# Altium PCB DE-140824.PcbDoc (part 1 of 2)
Units mil, origin at the board's own origin, x right, y up, seen from the top; angles counter-clockwise.
Board outline 2677.17 x 5787.4 mil, 4 copper layers (Top Layer, GND, PWR, Bottom Layer), stack 30.634 mil thick; 176 components, 215 nets, 592 pads, 37 vias.
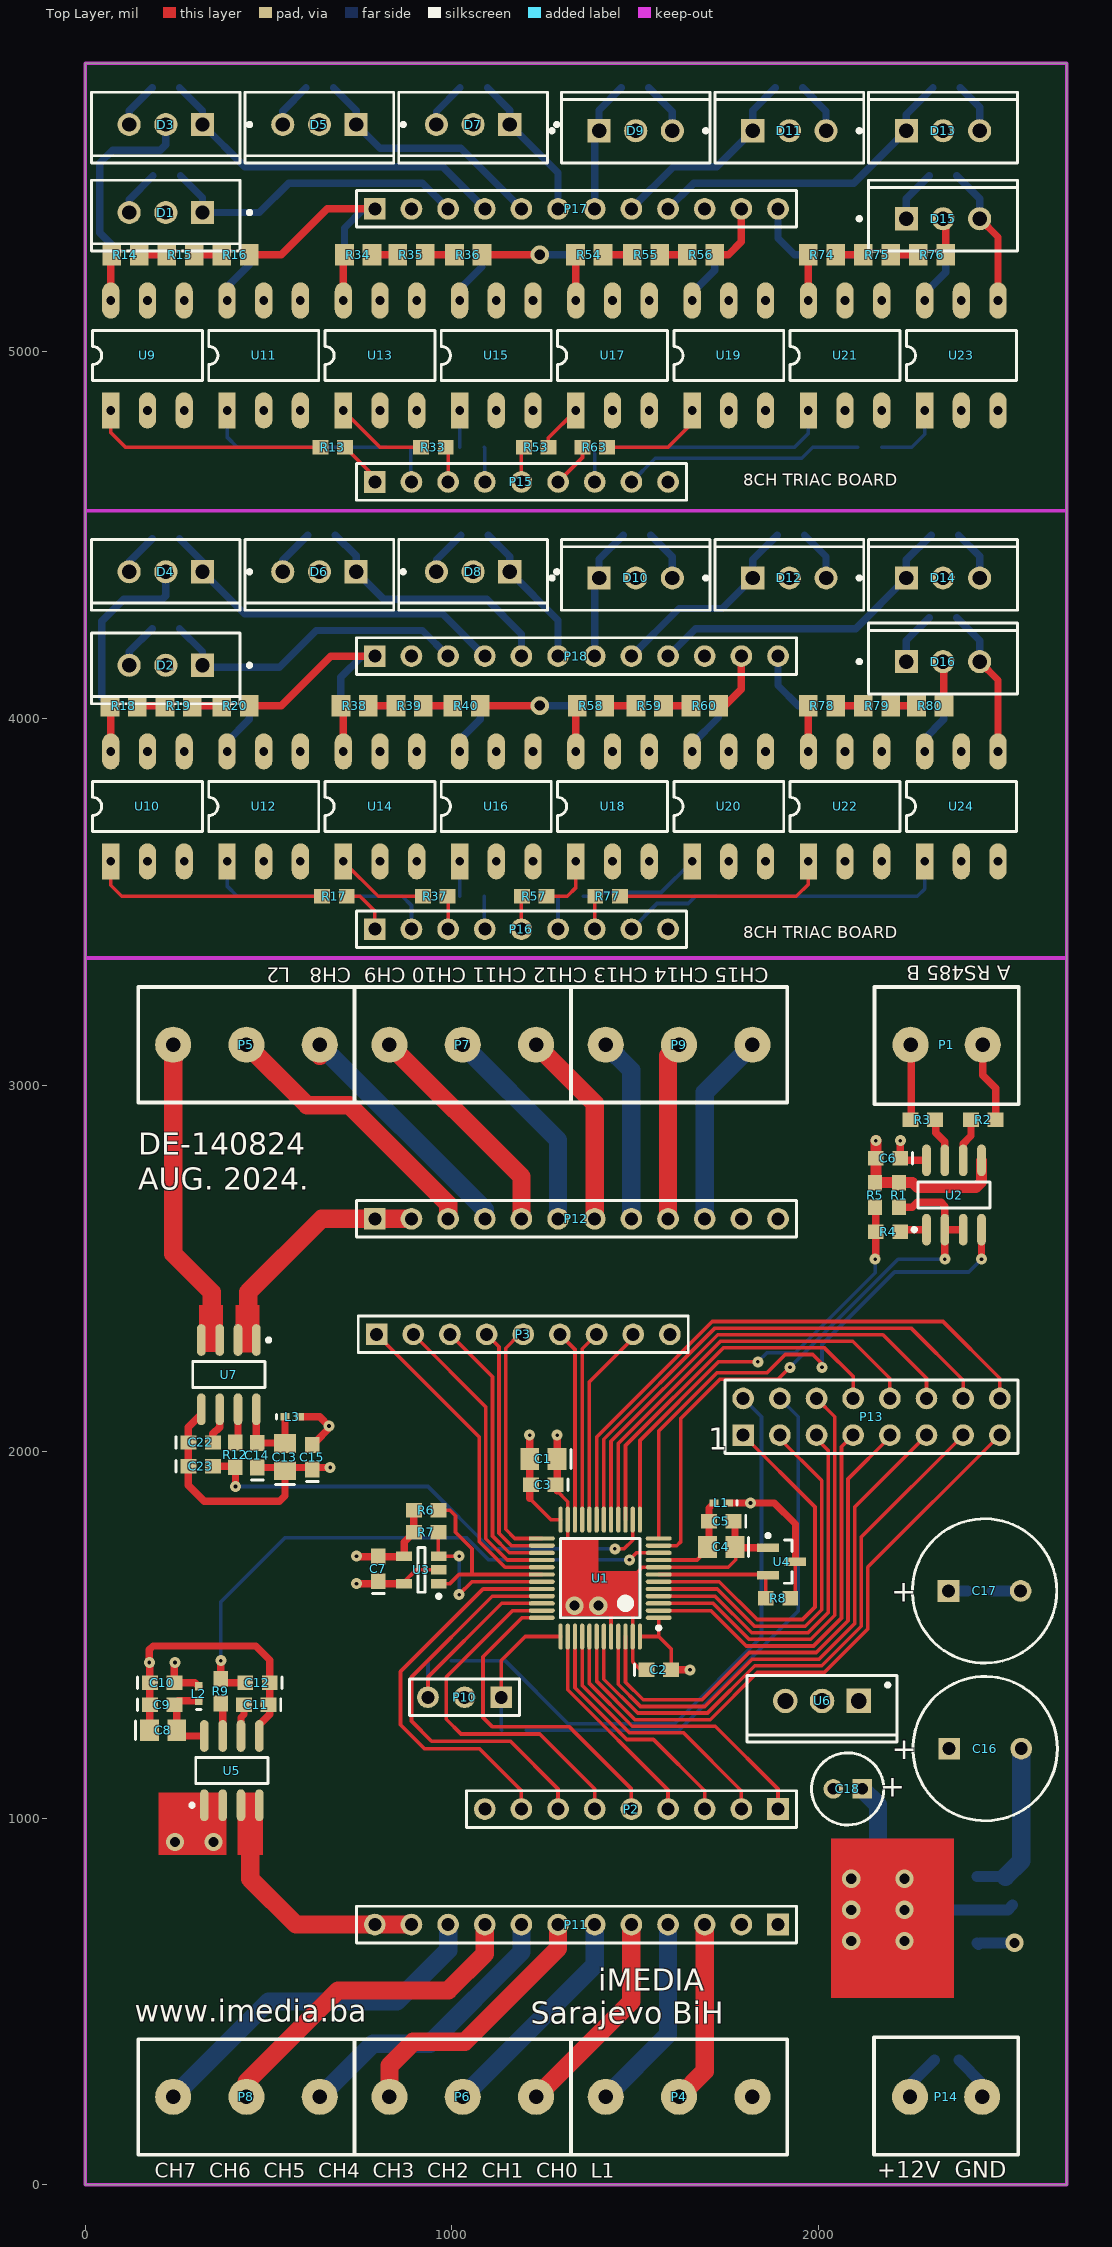
[diagram p0: Top Layer view]
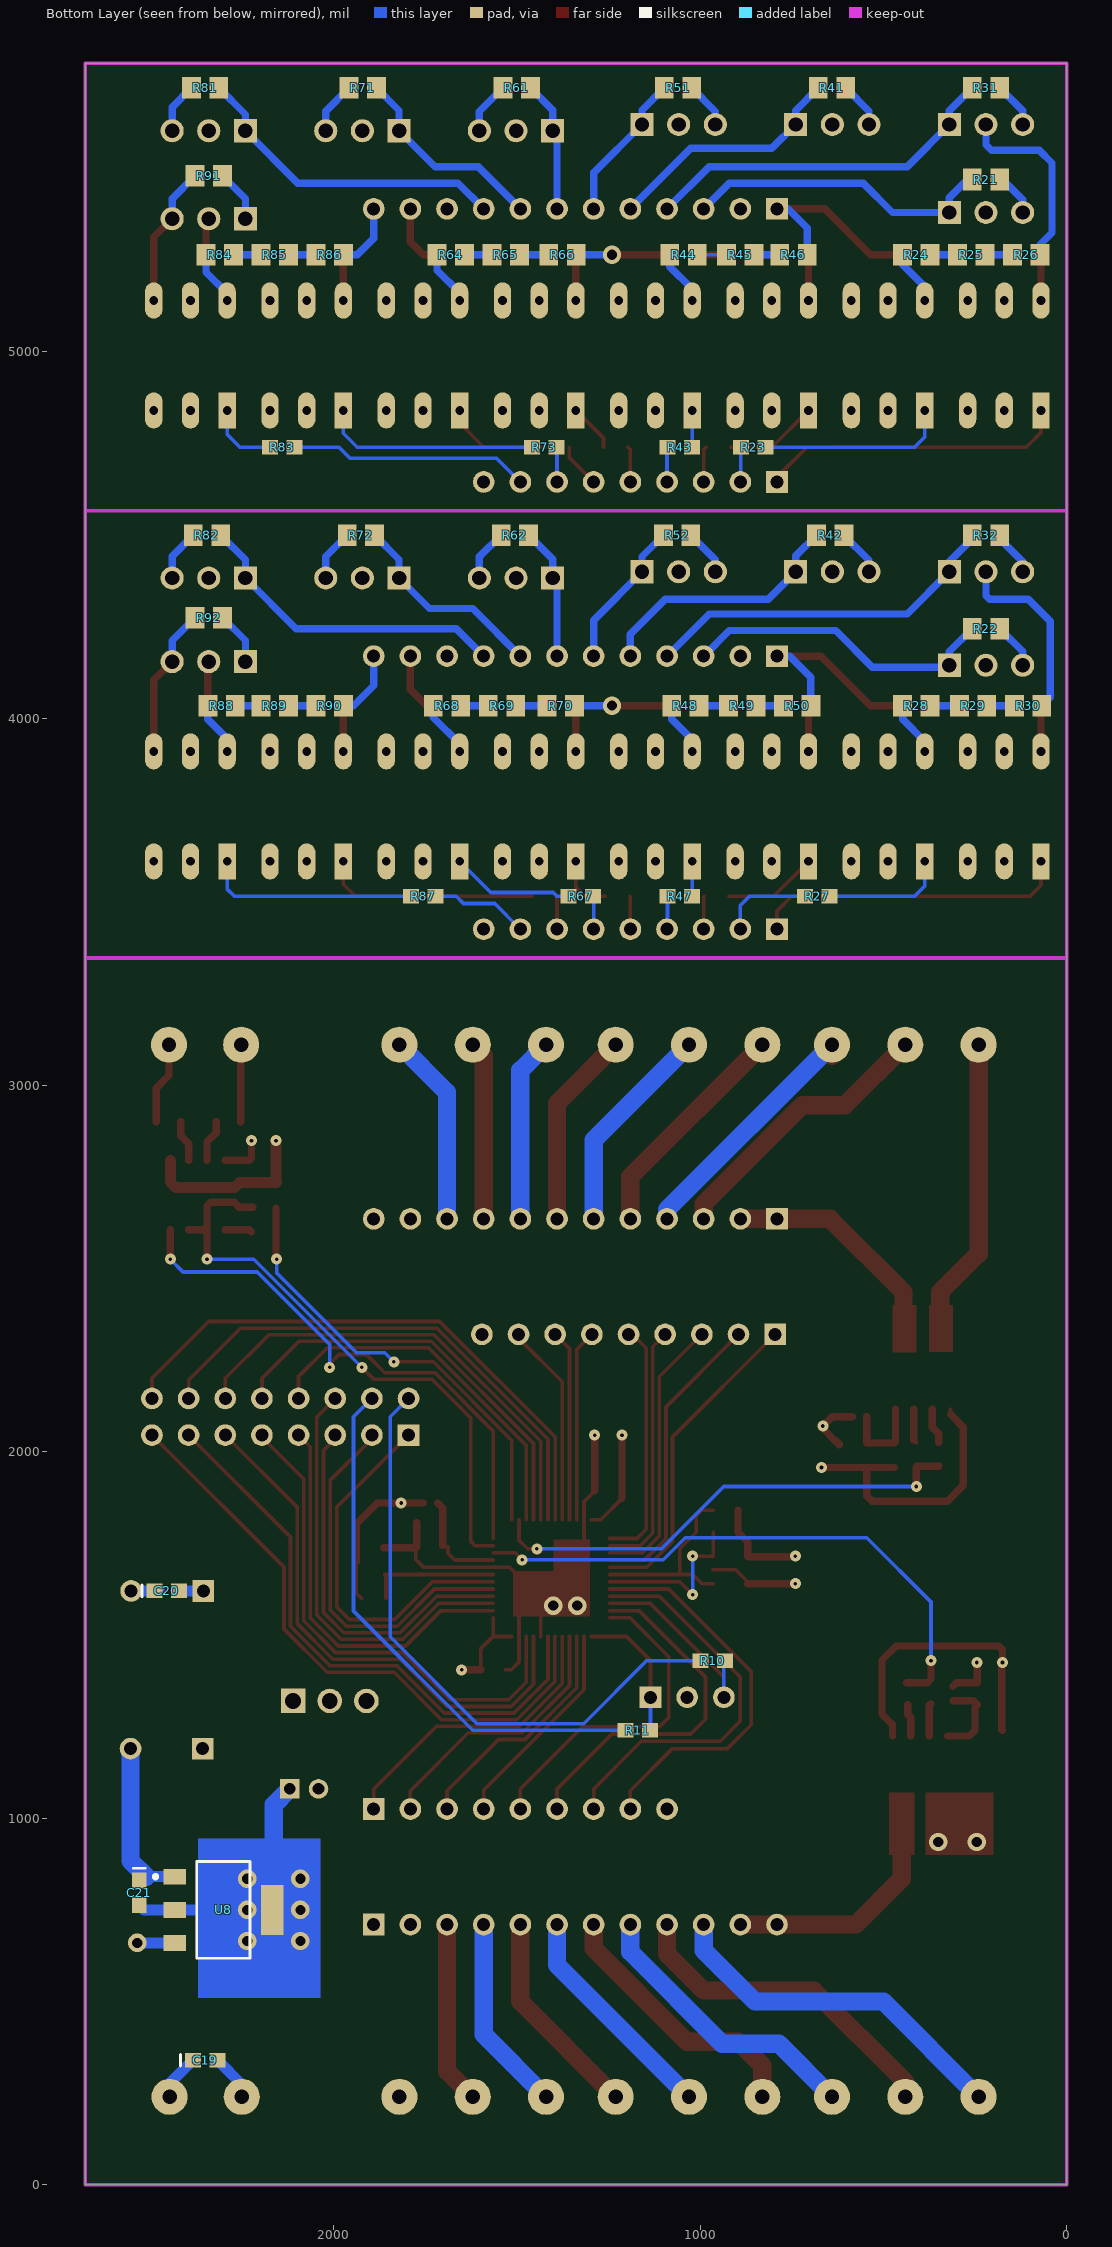
[diagram p1: Bottom Layer view, seen from below]
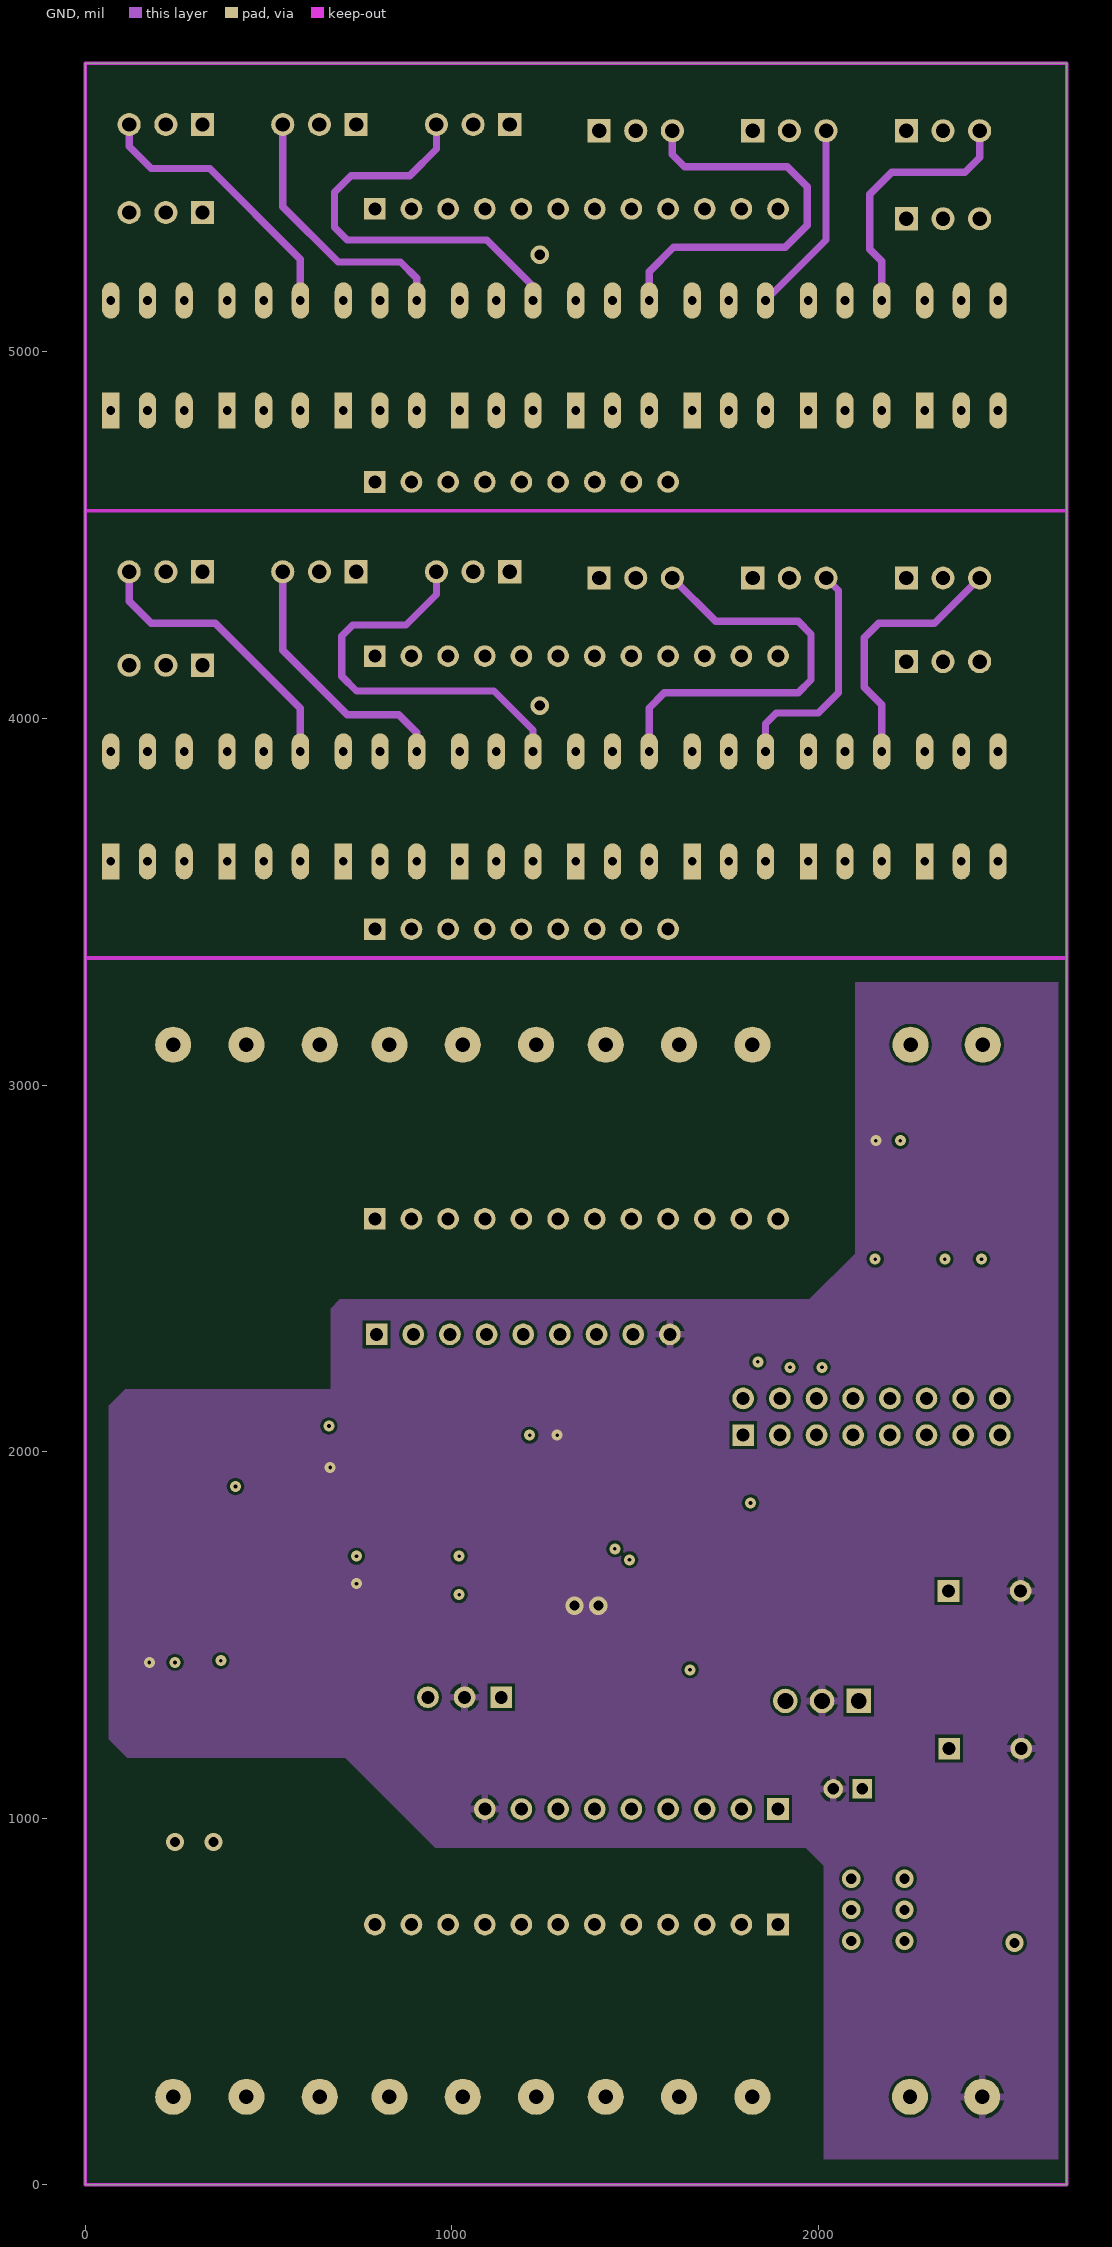
[diagram p2: GND]
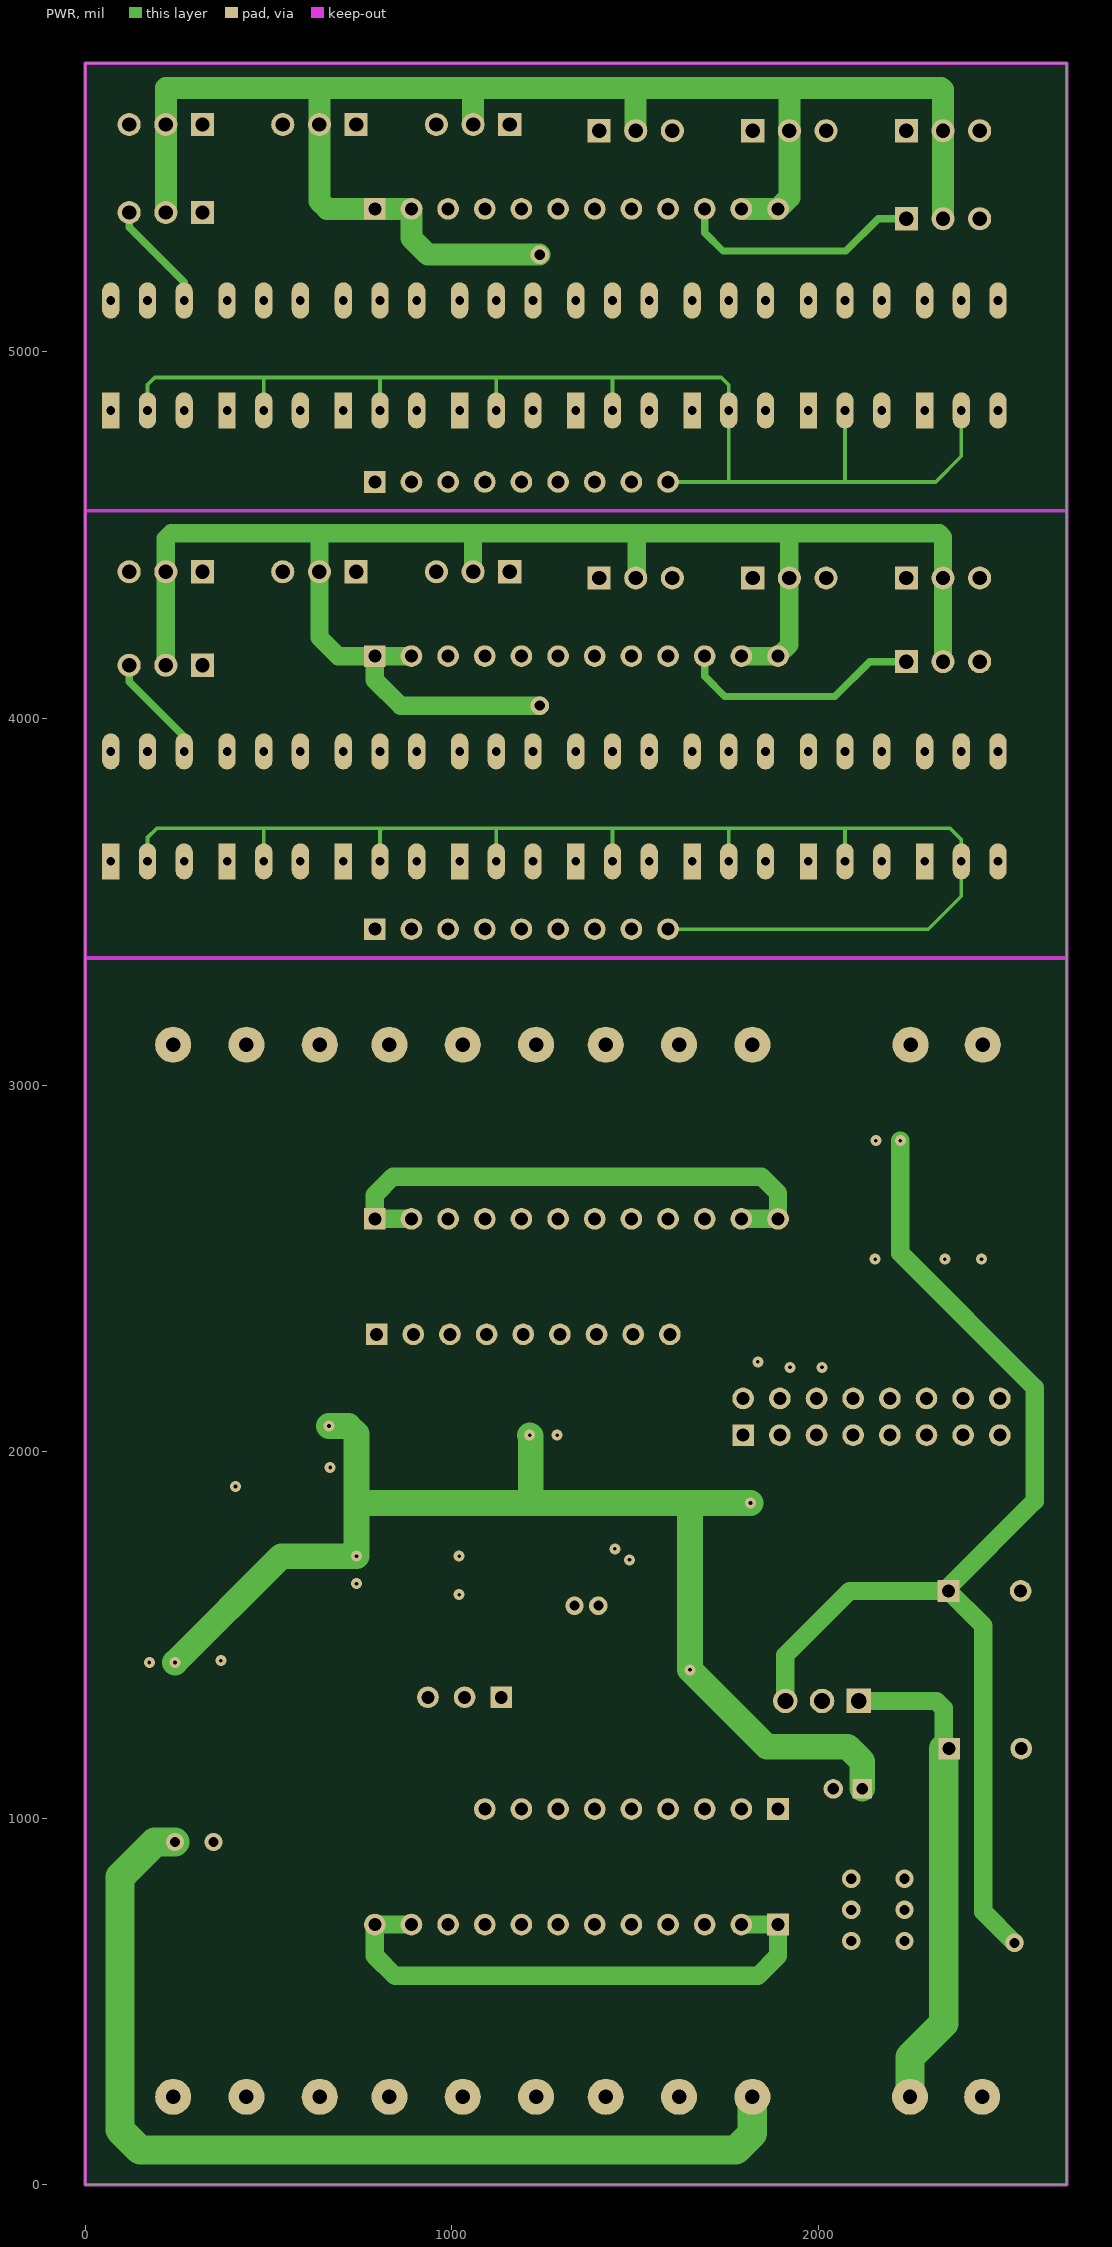
[diagram p3: PWR]

## Layer stack, top to bottom
Top Solder: solder mask 0.4, Solder Resist, Dk 3.5
Top Layer: signal copper 1.4
Dielectric 1: core 10, FR-4, Dk 4.2
GND: signal copper 1.417
Dielectric 3: prepreg 5, Dk 4.2
PWR: signal copper 1.417
Dielectric 2: core 10, Dk 4.2
Bottom Layer: signal copper 1.4
Bottom Solder: solder mask 0.4, Solder Resist, Dk 3.5

## Board outline
0,0 0,5787.4 2677.17,5787.4 2677.17,0

## Design rules (kind name [scope] priority, off if disabled: settings)
BoardOutlineClearance [All] p1: gap=11.81 ignorepadtopadclearanceinfootprint=FALSE except(15.75: Arc-SplitBarrior Arc-SplitContinuation Track-SplitBarrior Track-SplitContinuation SMDPad-SplitBarrior SMDPad-SplitContinuation THPad-SplitBarrior THPad-SplitContinuation Via-SplitBarrior Via-SplitContinuation Fill-SplitBarrior Fill-SplitContinuation Poly-SplitBarrior Poly-SplitContinuation Region-SplitBarrior Region-SplitContinuation Text-SplitBarrior Text-SplitContinuation)
Clearance "Clearance Different Nets" [All] p1: gap=7.87 ignorepadtopadclearanceinfootprint=FALSE except(3.5: Arc-Arc Arc-Track Arc-SMDPad Track-Track Track-SMDPad; 5: SMDPad-SMDPad SMDPad-Via THPad-Via Via-Via; 10: Arc-Via Arc-Text Track-Via Track-Text SMDPad-Text THPad-Text Via-Text Fill-Text Poly-Text Region-Text Text-Text; 19.68: THPad-THPad Via-Hole)
Clearance "Clearance Same Nets" [All] p2: gap=7.87 ignorepadtopadclearanceinfootprint=FALSE except(3.5: Arc-Arc Arc-Track Arc-SMDPad Track-Track Track-SMDPad SMDPad-SMDPad; 5: SMDPad-Via THPad-Via; 10: Arc-Via Arc-Text Track-Via Track-Text SMDPad-Text THPad-Text Via-Via Via-Text Fill-Text Poly-Text Region-Text Text-Text)
Clearance "Clearance Bottom Layer" [OnLayer('Bottom Layer')] p3: gap=8 ignorepadtopadclearanceinfootprint=TRUE except(10: Arc-Text Track-Text SMDPad-Text THPad-Text Via-Text Fill-Text Poly-Text Region-Text Text-Text)
Clearance "Clearance Top Layer" [OnLayer('Top Layer')] p4: gap=8 ignorepadtopadclearanceinfootprint=TRUE except(10: Arc-Text Track-Text SMDPad-Text THPad-Text Via-Text Fill-Text Poly-Text Region-Text Text-Text)
HoleSize [All] p1: absolutevalues=TRUE maxlimit=248.03 minlimit=7.87 maxpercent=80.000 minpercent=20.000
MinimumAnnularRing [All] p1: minimumring=5.12
MinimumSolderMaskSliver [All] p1: minsoldermaskwidth=3.94
PolygonConnect PolygonConnect_1 [All] p1: thpad.connectstyle=Relief thpad.reliefconductorwidth=20 thpad.reliefentries=4 thpad.polygonreliefangle="90 Angle" thpad.airgapwidth=10 smdpad.connectstyle=Relief smdpad.reliefconductorwidth=20 smdpad.reliefentries=4 smdpad.polygonreliefangle="90 Angle" smdpad.airgapwidth=10 via.connectstyle=Direct via.reliefconductorwidth=20 via.reliefentries=4 via.polygonreliefangle="90 Angle" via.airgapwidth=10
RoutingCorners [All] p1: cornerstyle=Round minsetback=100 maxsetback=100
RoutingVias [All] p1: holewidth=19.68 width=39.37 viastyle="Through Hole" minholewidth=7.87 minwidth=13.78 maxholewidth=39.37 maxwidth=78.74
SilkToSilkClearance [All] p1: silktosilkclearance=3.94
SilkToSolderMaskClearance [IsPad] p1: minsilkscreentomaskgap=3.94 clearancetoexposedcopper=TRUE
SolderMaskExpansion [All] p1: expansion=4 istentingtop=FALSE
Width [All] p1: maxlimit=100 minlimit=3.5 preferedwidth=15
25 further rules are at their usual default settings.

## Classes and differential pairs
component class DE-140824: C1 C2 C3 C4 C5 C6 C7 C8 C9 C10 C11 C12 C13 C14 C15 C16 C17 C18 C19 C20 C21 C22 C23 L1 L2 L3 P1 P2 P3 P4 P5 P6 P7 P8 P9 P10 P11 P12 P13 P14 R1 R2 R3 R4 R5 R6 R7 R8 R9 R10 R11 R12 U1 U2 U3 U4 U5 U6 U7 U8
component class DE-140824_01: D1 D2 D3 D4 D5 D6 D7 D8 D9 D10 D11 D12 D13 D14 D15 D16 P15 P16 P17 P18 R13 R14 R15 R16 R17 R18 R19 R20 R21 R22 R23 R24 R25 R26 R27 R28 R29 R30 R31 R32 R33 R34 R35 R36 R37 R38 R39 R40 R41 R42 R43 R44 R45 R46 R47 R48 R49 R50 R51 R52 R53 R54 R55 R56 R57 R58 R59 R60 R61 R62 R63 R64 R65 R66 R67 R68 R69 R70 R71 R72 R73 R74 R75 R76 R77 R78 R79 R80 R81 R82 R83 R84 R85 R86 R87 R88 R89 R90 R91 R92 U9 U10 U11 U12 U13 U14 U15 U16 U17 U18 U19 U20 U21 U22 U23 U24

## Components (designator, comment, footprint, x,y, rotation, side; value= is the part's Value field where it differs from the comment)
C1 "C0805" 0805 1250,1980 r180 top value=4u7
C2 "C0603" 0603 1565,1405 r0 top value=100nF
C3 "C0603" 0603 1250,1910 r180 top value=100nF
C4 "C0805" 0805 1735,1740 r180 top value=4u7
C5 "C0603" 0603 1735,1810 r180 top value=100nF
C6 "100nF" 0603 2190,2800 r180 top
C7 "C0603" 0603 800,1680 r90 top value=100nF
C8 "C0805" 0805 212.6,1240 r0 top value=4u7
C9 "C0603" 0603 210,1310 r0 top value=100nF
C10 "C0603" 0603 210,1370 r0 top value=100nF
C11 "C0603" 0603 466.54,1310 r180 top value=10nF
C12 "C0603" 0603 470,1370 r180 top value=100nF
C13 "C0805" 0805 545,1985 r90 top value=4u7
C14 "C0603" 0603 470,1990 r90 top value=100nF
C15 "C0603" 0603 620,1985 r90 top value=100nF
C16 "470uF" CAPPR5-10X12.5 2455,1190 r0 top
C17 "470uF" CAPPR5-10X12.5 2453.43,1620 r0 top
C18 "22uF" CAPPR2-5X11 2080,1080 r180 top value=47uF
C19 "100nF" 0603 2350,340 r180 bottom
C20 "100nF" 0603 2455,1620 r180 bottom
C21 "100nF" 0603 2530,796.54 r270 bottom
C22 "C0603" 0603 315,2025 r0 top value=10nF
C23 "C0603" 0603 315,1960 r0 top value=100nF
D1 "BTA08-600" ONSC-TO-220-3-221A-07 220,5380 r270 top
D2 "BTA08-600" ONSC-TO-220-3-221A-07 220,4145 r270 top
D3 "BTA08-600" ONSC-TO-220-3-221A-07 220,5620 r270 top
D4 "BTA08-600" ONSC-TO-220-3-221A-07 220,4400 r270 top
D5 "BTA08-600" ONSC-TO-220-3-221A-07 639.08,5620 r270 top
D6 "BTA08-600" ONSC-TO-220-3-221A-07 639.08,4400 r270 top
D7 "BTA08-600" ONSC-TO-220-3-221A-07 1058.16,5620 r270 top
D8 "BTA08-600" ONSC-TO-220-3-221A-07 1058.16,4400 r270 top
D9 "BTA08-600" ONSC-TO-220-3-221A-07 1501.84,5603.07 r90 top
D10 "BTA08-600" ONSC-TO-220-3-221A-07 1501.84,4383.07 r90 top
D11 "BTA08-600" ONSC-TO-220-3-221A-07 1920.92,5603.07 r90 top
D12 "BTA08-600" ONSC-TO-220-3-221A-07 1920.92,4383.07 r90 top
D13 "BTA08-600" ONSC-TO-220-3-221A-07 2340,5603.07 r90 top
D14 "BTA08-600" ONSC-TO-220-3-221A-07 2340,4383.07 r90 top
D15 "BTA08-600" ONSC-TO-220-3-221A-07 2340,5363.07 r90 top
D16 "BTA08-600" ONSC-TO-220-3-221A-07 2340,4155 r90 top
L1 "BLM15AG121" 0402-A 1735,1860 r180 top
L2 "BLM15AG121" 0402-A 310,1340 r90 top
L3 "BLM15AG121" 0402-A 565,2095 r0 top
P1 "RS485" "TERMINAL BLOK 2" 2350,3110 r270 top locked
P2 "Header 9" HDR1X9 1890,1025 r180 top locked
P3 "Header 9" HDR1X9 795,2320 r0 top locked
P4 "" "TERMINAL BLOK 3" 1620,240 r90 top locked
P5 "" "TERMINAL BLOK 3" 440,3110 r270 top locked
P6 "" "TERMINAL BLOK 3" 1030,240 r90 top locked
P7 "" "TERMINAL BLOK 3" 1030,3110 r270 top locked
P8 "" "TERMINAL BLOK 3" 440,240 r90 top locked
P9 "" "TERMINAL BLOK 3" 1620,3110 r270 top locked
P10 "ICSP" HDR1X3 1135,1330 r180 top
P11 "Header 12" HDR1X12 1890,710 r180 top locked
P12 "Header 12" HDR1X12 790,2635 r0 top locked
P13 "Header 8X2" HDR2X8 1795,2045 r0 top
P14 "DC_IN" "TERMINAL BLOK 2" 2348.43,240 r90 top locked
P15 "Header 9" HDR1X9 790,4645 r0 top locked
P16 "Header 9" HDR1X9 790,3425 r0 top locked
P17 "Header 12" HDR1X12 790,5390 r0 top locked
P18 "Header 12" HDR1X12 790,4170 r0 top locked
R1 "10K" ERA-0603 2220,2700 r270 top
R2 "10R" ERA-0603 2450,2905 r180 top
R3 "10R" ERA-0603 2285,2905 r0 top
R4 "1K2" ERA-0603 2190,2600 r0 top
R5 "2K2" ERA-0603 2154.57,2700 r90 top
R6 "2K2" ERA-0603 930,1840 r180 top
R7 "2K2" ERA-0603 930,1780 r180 top
R8 "10K" ERA-0603 1890,1600 r0 top
R9 "100R" ERA-0603 370,1346.54 r270 top
R10 "10K" ERA-0603 965,1430 r0 bottom
R11 "10K" ERA-0603 1170,1240 r0 bottom
R12 "100R" ERA-0603 410,1991.54 r90 top
R13 "220R" ERA-0603 675,4740 r180 top
R14 "120R" ERA-0805 110,5265 r0 top
R15 "120R" ERA-0805 260,5265 r0 top
R16 "120R" ERA-0805 410,5265 r0 top
R17 "220R" ERA-0603 680,3515 r180 top
R18 "120R" ERA-0805 105,4035 r0 top
R19 "120R" ERA-0805 255,4035 r0 top
R20 "120R" ERA-0805 410,4035 r0 top
R21 "330R" ERA-0805 220,5470 r0 bottom
R22 "330R" ERA-0805 220,4245 r0 bottom
R23 "220R" ERA-0603 855,4740 r180 bottom
R24 "120R" ERA-0805 410,5265 r180 bottom
R25 "120R" ERA-0805 260,5265 r180 bottom
R26 "120R" ERA-0805 110,5265 r180 bottom
R27 "220R" ERA-0603 680,3515 r180 bottom
R28 "120R" ERA-0805 410,4035 r180 bottom
R29 "120R" ERA-0805 255,4035 r180 bottom
R30 "120R" ERA-0805 105,4035 r180 bottom
R31 "330R" ERA-0805 220,5720 r0 bottom
R32 "330R" ERA-0805 220,4500 r0 bottom
R33 "220R" ERA-0603 950,4740 r180 top
R34 "120R" ERA-0805 745,5265 r0 top
R35 "120R" ERA-0805 890,5265 r0 top
R36 "120R" ERA-0805 1045,5265 r0 top
R37 "220R" ERA-0603 955,3515 r180 top
R38 "120R" ERA-0805 735,4035 r0 top
R39 "120R" ERA-0805 885,4035 r0 top
R40 "120R" ERA-0805 1040,4035 r0 top
R41 "330R" ERA-0805 640,5720 r0 bottom
R42 "330R" ERA-0805 645,4500 r0 bottom
R43 "220R" ERA-0603 1055,4740 r180 bottom
R44 "120R" ERA-0805 1045,5265 r180 bottom
R45 "120R" ERA-0805 890,5265 r180 bottom
R46 "120R" ERA-0805 745,5265 r180 bottom
R47 "220R" ERA-0603 1055,3515 r180 bottom
R48 "120R" ERA-0805 1040,4035 r180 bottom
R49 "120R" ERA-0805 885,4035 r180 bottom
R50 "120R" ERA-0805 735,4035 r180 bottom
R51 "330R" ERA-0805 1060,5720 r0 bottom
R52 "330R" ERA-0805 1062.4,4500 r0 bottom
R53 "220R" ERA-0603 1230,4740 r0 top
R54 "120R" ERA-0805 1375,5265 r0 top
R55 "120R" ERA-0805 1530,5265 r0 top
R56 "120R" ERA-0805 1680,5265 r0 top
R57 "220R" ERA-0603 1225,3515 r0 top
R58 "120R" ERA-0805 1380,4035 r0 top
R59 "120R" ERA-0805 1540,4035 r0 top
R60 "120R" ERA-0805 1690,4035 r0 top
R61 "330R" ERA-0805 1500,5720 r180 bottom
R62 "330R" ERA-0805 1505,4500 r180 bottom
R63 "220R" ERA-0603 1390,4740 r0 top
R64 "120R" ERA-0805 1680,5265 r180 bottom
R65 "120R" ERA-0805 1530,5265 r180 bottom
R66 "120R" ERA-0805 1375,5265 r180 bottom
R67 "220R" ERA-0603 1325,3515 r0 bottom
R68 "120R" ERA-0805 1690,4035 r180 bottom
R69 "120R" ERA-0805 1540,4035 r180 bottom
R70 "120R" ERA-0805 1380,4035 r180 bottom
R71 "330R" ERA-0805 1920,5720 r180 bottom
R72 "330R" ERA-0805 1925,4500 r180 bottom
R73 "220R" ERA-0603 1425,4740 r0 bottom
R74 "120R" ERA-0805 2010,5265 r0 top
R75 "120R" ERA-0805 2160,5265 r0 top
R76 "120R" ERA-0805 2310,5265 r0 top
R77 "220R" ERA-0603 1425,3515 r0 top
R78 "120R" ERA-0805 2010,4035 r0 top
R79 "120R" ERA-0805 2160,4035 r0 top
R80 "120R" ERA-0805 2305,4035 r0 top
R81 "330R" ERA-0805 2350,5720 r180 bottom
R82 "330R" ERA-0805 2345,4500 r180 bottom
R83 "220R" ERA-0603 2140,4740 r0 bottom
R84 "120R" ERA-0805 2310,5265 r180 bottom
R85 "120R" ERA-0805 2160,5265 r180 bottom
R86 "120R" ERA-0805 2010,5265 r180 bottom
R87 "220R" ERA-0603 1755,3515 r0 bottom
R88 "120R" ERA-0805 2305,4035 r180 bottom
R89 "120R" ERA-0805 2160,4035 r180 bottom
R90 "120R" ERA-0805 2010,4035 r180 bottom
R91 "330R" ERA-0805 2340,5480 r180 bottom
R92 "330R" ERA-0805 2340,4275 r180 bottom
U1 "STM32F030C6T6" STM-LQFP48_N 1405,1655 r180 top
U2 "SN75176BD" D008_N 2370,2700 r90 top
U3 "24AA01T-I/OT" SOT-23-OT5_N 917.24,1677.4 r180 top
U4 "TLV803MDBZR" DBZ3_N 1900,1700 r0 top
U5 "MCS1802GS-10-Z" SOIC-SN8_N 400,1130 r90 top
U6 "L7805CV" TO220 2010,1320 r180 top
U7 "MCS1802GS-10-Z" SOIC-SN8_N 391.93,2210 r270 top
U8 "REG1117-3.3" ZZ311 2300,750 r270 bottom
U9 "MOC3081" DIP6 70,4840 r90 top
U10 "MOC3081" DIP6 70,3610 r90 top
U11 "MOC3081" DIP6 387.14,4840 r90 top
U12 "MOC3081" DIP6 387.14,3610 r90 top
U13 "MOC3081" DIP6 704.29,4840 r90 top
U14 "MOC3081" DIP6 704.29,3610 r90 top
U15 "MOC3081" DIP6 1021.43,4840 r90 top
U16 "MOC3081" DIP6 1021.43,3610 r90 top
U17 "MOC3081" DIP6 1338.57,4840 r90 top
U18 "MOC3081" DIP6 1338.57,3610 r90 top
U19 "MOC3081" DIP6 1655.71,4840 r90 top
U20 "MOC3081" DIP6 1655.71,3610 r90 top
U21 "MOC3081" DIP6 1972.86,4840 r90 top
U22 "MOC3081" DIP6 1972.86,3610 r90 top
U23 "MOC3081" DIP6 2290,4840 r90 top
U24 "MOC3081" DIP6 2290,3610 r90 top

## Footprints (in the part's own frame and the unit in brackets; to place one, negate y for a bottom-side part, rotate by r counter-clockwise, add the part's x,y. Pads: shape width x height; smd on the part's side, far side on the other; paste and mask are expansions set on the pad)
0402-A [mm] "Chip Inductor, Body 1.0x0.5mm, IPC High Density"
  rect 0.6x0.5 smd: 1(-0.5,0) 2(0.5,0)
  silkscreen extent -1.1,-0.15 -1.1,0.15, body extent -0.55,-0.3 0.55,0.3, height 0.55
0603 [mm] "Chip Capacitor; Body 1.6 x 0.8 mm (LxW typ)"
  rect 1.1x1 smd: 1(-0.85,0) 2(0.85,0)
  silkscreen extent -1.7,-0.4 -1.7,0.4
0805 [mm] "Chip Capacitor; Body 2.0 x 1.2 mm (LxW typ)"
  rect 1.3x1.5 smd: 1(-0.95,0) 2(0.95,0)
  silkscreen extent -1.9,-0.65 -1.9,0.65
CAPPR2-5X11 [mm] "Capacitor, Electrolytic, Radial; Body 5 x 11 mm (Dia.xH typ); Pin Spacing 2 mm (typ)"
  rect 1.35x1.35 hole 0.8: 1(-1,0)
  round 1.35 hole 0.8: 2(1,0)
  silkscreen extent -2.5,-2.5 2.5,2.5
CAPPR5-10X12.5 [mm] "Capacitor, Electrolytic, Radial; Body 10 x 12.5 mm (Dia.xH typ); Pin Spacing 5 mm (typ)"
  rect 1.5x1.5 hole 0.9: 1(-2.5,0)
  round 1.5 hole 0.9: 2(2.5,0)
  silkscreen extent -5,-5 5,5, body extent -5,-5 5,5, height 12.5
D008_N [mm] "SOIC, 8-Leads, Body 4.9x3.9mm, Pitch 1.27mm, IPC Medium Density"
  oval 2.2x0.6 smd: 1(-2.4,1.905) 2(-2.4,0.635) 3(-2.4,-0.635) 4(-2.4,-1.905) 5(2.4,-1.905) 6(2.4,-0.635) 7(2.4,0.635) 8(2.4,1.905)
  silkscreen extent -2.52,-2.5 0.9,2.88, body extent -1.95,-2.45 1.95,2.45, height 1.75
DBZ3_N [mm] "SOT23, 3-Leads, Body 2.9x1.3mm, Pitch 0.95mm, Lead Span 2.4mm, IPC Medium Density"
  rect 1.5x0.6 smd: 1(-0.95,0.95) 2(-0.95,-0.95) 3(0.95,0)
  silkscreen extent -1.07,-1.5 0.7,1.92, body extent -0.7,-1.52 0.7,1.52, height 1.12
DIP6 [mm]
  rect 2.5x1.2 hole 0.6: 1(0,0)
  oval 2.5x1.2 hole 0.6: 2(0,-2.54) 3(0,-5.08) 4(7.62,-5.08) 5(7.62,-2.54) 6(7.62,0)
  silkscreen extent 2.08,-6.35 5.54,1.27, body extent 0.63,-6.48 6.98,1.27, height 1
ERA-0603 [mm] "Chip Resistor; Body 1.6 x 0.8 mm (LxW typ)"
  rect 1.1x1 smd: 1(-0.85,0) 2(0.85,0)
ERA-0805 [mm] "Chip Resistor; Body 2 x 1.3 mm (LxW typ)"
  rect 1.3x1.5 smd: 1(-0.95,0) 2(0.95,0)
HDR1X3 [mm] "Connector; Header; 3 Position"
  rect 1.5x1.5 hole 0.9: 1(0,0)
  round 1.5 hole 0.9: 2(2.54,0) 3(5.08,0)
  silkscreen extent -1.27,-1.27 6.35,1.27
HDR1X9 [mm] "Connector; Header; 9 Position"
  rect 1.5x1.5 hole 0.9: 1(0,0)
  round 1.5 hole 0.9: 2(2.54,0) 3(5.08,0) 4(7.62,0) 5(10.16,0) 6(12.7,0) 7(15.24,0) 8(17.78,0) 9(20.32,0)
  silkscreen extent -1.27,-1.27 21.59,1.27
HDR1X12 [mm] "Connector; Header; 12 Position"
  rect 1.5x1.5 hole 0.9: 1(0,0)
  round 1.5 hole 0.9: 2(2.54,0) 3(5.08,0) 4(7.62,0) 5(10.16,0) 6(12.7,0) 7(15.24,0) 8(17.78,0) 9(20.32,0) 10(22.86,0) 11(25.4,0) 12(27.94,0)
  silkscreen extent -1.27,-1.27 29.21,1.27
HDR2X8 [mm] "Connector; Header; 8x2 Position"
  rect 1.5x1.5 hole 0.9: 1(0,0)
  round 1.5 hole 0.9: 2(0,2.54) 3(2.54,0) 4(2.54,2.54) 5(5.08,0) 6(5.08,2.54) 7(7.62,0) 8(7.62,2.54) 9(10.16,0) 10(10.16,2.54) 11(12.7,0) 12(12.7,2.54) 13(15.24,0) 14(15.24,2.54) 15(17.78,0) 16(17.78,2.54)
  silkscreen extent -1.27,-1.27 19.05,3.81
ONSC-TO-220-3-221A-07 [mm] "FM, 3-Leads, Body 10.3x4.85mm, Pitch 2.54mm"
  rect 1.6x1.6 hole 1: 1(0,2.54)
  round 1.6 hole 1: 2(0,0) 3(0,-2.54)
  silkscreen extent -2.23,-5.15 2.67,5.93, body extent -2.21,-5.15 2.64,5.15, height 19.68
SOIC-SN8_N [mm] "SOIC, 8-Leads, Body 4.9x3.8mm, Pitch 1.27mm, IPC Medium Density"
  oval 2.2x0.6 smd: 1(-2.4,1.905) 2(-2.4,0.635) 3(-2.4,-0.635) 4(-2.4,-1.905) 5(2.4,-1.905) 6(2.4,-0.635) 7(2.4,0.635) 8(2.4,1.905)
  silkscreen extent -2.52,-2.5 0.9,2.88, body extent -2,-2.5 2,2.5, height 1.75
SOT-23-OT5_N [mm] "SOT23, 5-Leads, Body 2.9x1.6mm, Pitch 0.95mm, Lead Span 2.7mm, IPC Medium Density"
  rect 1.1x0.65 smd: 1(-1.2,0.95) 2(-1.2,0) 3(-1.2,-0.95) 4(1.2,-0.95) 5(1.2,0.95)
  silkscreen extent -1.33,-1.55 0.25,1.95, body extent -0.9,-1.55 0.9,1.55, height 1.45
STM-LQFP48_N [mm] "QFP, 48-Leads, Body 7x7mm, Pitch 0.5mm, IPC Medium Density"
  oval 1.8x0.3 smd: 1(-4.05,2.75) 2(-4.05,2.25) 3(-4.05,1.75) 4(-4.05,1.25) 5(-4.05,0.75) 6(-4.05,0.25) 7(-4.05,-0.25) 8(-4.05,-0.75) 9(-4.05,-1.25) 10(-4.05,-1.75) 11(-4.05,-2.25) 12(-4.05,-2.75) 25(4.05,-2.75) 26(4.05,-2.25) 27(4.05,-1.75) 28(4.05,-1.25) 29(4.05,-0.75) 30(4.05,-0.25) 31(4.05,0.25) 32(4.05,0.75) 33(4.05,1.25) 34(4.05,1.75) 35(4.05,2.25) 36(4.05,2.75)
  oval 0.3x1.8 smd: 13(-2.75,-4.05) 14(-2.25,-4.05) 15(-1.75,-4.05) 16(-1.25,-4.05) 17(-0.75,-4.05) 18(-0.25,-4.05) 19(0.25,-4.05) 20(0.75,-4.05) 21(1.25,-4.05) 22(1.75,-4.05) 23(2.25,-4.05) 24(2.75,-4.05) 37(2.75,4.05) 38(2.25,4.05) 39(1.75,4.05) 40(1.25,4.05) 41(0.75,4.05) 42(0.25,4.05) 43(-0.25,4.05) 44(-0.75,4.05) 45(-1.25,4.05) 46(-1.75,4.05) 47(-2.25,4.05) 48(-2.75,4.05)
  silkscreen extent -4.18,-2.75 2.75,3.57, body extent -3.5,-3.5 3.5,3.5, height 1.6
"TERMINAL BLOK 2" [mm] "Terminal blok 3,5mm"
  round 2.5 hole 1: 1(0,-2.5) 2(0,2.5)
  silkscreen extent -4,-5 4.13,5
"TERMINAL BLOK 3" [mm] "Terminal blok konektor 3 pina"
  round 2.5 hole 1: 1(0,5.08) 2(0,0) 3(0,-5.08)
  silkscreen extent -4,-7.5 4,7.5
TO220 [mm] "TO, Thru-Hole, Vertical, Heatsink Mounted; 3 In-Line Leads; Pitch 2.54 mm"
  rect 1.7x1.7 hole 1.1: 1(-2.54,0)
  round 1.7 hole 1.1: 2(0,0) 3(2.54,0)
  silkscreen extent -5.2,-1.75 5.2,2.85, body extent -5.25,-1.8 5.25,2.9, height 19.7
ZZ311 [mm] "SOT-223/SC-73; 4 Leads; Body 6.7 x 7.3 mm, inc. leads (LxW max)"
  rect 1.1x1.55 smd: 1(-2.3,-3.375) 2(0,-3.375) 3(2.3,-3.375)
  rect 3.45x1.55 smd: 4(0,3.375)
  silkscreen extent -3.35,-4.83 3.35,1.85

## Part data
C1 C2 C3 C4 C5 C7 C8 C9 C10 C11 C12 C13 C14 C15 C22 C23: "Ceramic Chip Capacitor - Standard", PackageDocument=Mar-2001, ComponentLink1Description="Manufacturer Link", ComponentLink1URL=http://www.kemet.com/, ComponentLink2Description=Datasheet, ComponentLink2URL=http://www.kemet.com/kemet/web/homepage/kechome.nsf/vapubfilesname/F3102TA.pdf/$file/F3102TA.pdf, DatasheetDocument=Mar-2001, LatestRevisionDate=19-Mar-2004, LatestRevisionNote="Silkscreen size reduced.", Note="Footprint corresponds to dimensions for bulk cassette packaging. This case size has tightened tolerances.", Published=17-Jul-2002, Publisher="Altium Limited"
  C1 C4 C8 C13: Code_IPC=2012[0805], Code_JEITA=0805, PackageReference=0805
  C2 C3 C5 C7 C9 C10 C11 C12 C14 C15 C22 C23: Code_IPC="1608 [0603]", Code_JEITA=0603, PackageReference=0603
C6 C19 C20 C21: library part C0603, "Ceramic Chip Capacitor - Standard", PackageDocument=Mar-2001, Code_IPC="1608 [0603]", Code_JEITA=0603, ComponentLink1Description="Manufacturer Link", ComponentLink1URL=http://www.kemet.com/, ComponentLink2Description=Datasheet, ComponentLink2URL=http://www.kemet.com/kemet/web/homepage/kechome.nsf/vapubfilesname/F3102TA.pdf/$file/F3102TA.pdf, DatasheetDocument=Mar-2001, LatestRevisionDate=19-Mar-2004, LatestRevisionNote="Silkscreen size reduced.", Note="Footprint corresponds to dimensions for bulk cassette packaging. This case size has tightened tolerances.", PackageReference=0603, Published=17-Jul-2002, Publisher="Altium Limited"
C16 C17: library part EKA00DC347E00, "Aluminum Electrolytic Capacitor, Radial Style with Long Leads: 470uF, 25V", ComponentLink1Description="Manufacturer Link", ComponentLink1URL=http://www.vishay.com/, ComponentLink2Description=Datasheet, ComponentLink2URL=http://www.vishay.com/docs/25014/eka.pdf, DatasheetDocument=20-Feb-2001, DrillSize="Nominal, Rounded To The Nearest 0.1mm", Note="Refer to Manufacturer's Data Sheets for other lead formations", PackageReference=CAPPR5-10X12.5, Published=19-Mar-2004, Publisher="Altium Limited"
C18: library part EKA00AA247F00, "Aluminum Electrolytic Capacitor, Radial Style with Long Leads: 47uF, 35V", ComponentLink1Description="Manufacturer Link", ComponentLink1URL=http://www.vishay.com/, ComponentLink2Description=Datasheet, ComponentLink2URL=http://www.vishay.com/docs/25014/eka.pdf, DatasheetDocument=20-Feb-2001, DrillSize="Nominal, Rounded To The Nearest 0.1mm", Note="Refer to Manufacturer's Data Sheets for other lead formations", PackageReference=CAPPR2-5X11, Published=19-Mar-2004, Publisher="Altium Limited"
D1 D2 D3 D4 D5 D6 D7 D8 D9 D10 D11 D12 D13 D14 D15 D16: library part BTA08-600BW3G, "Triacs, Silicon Bidirectional Thyristor, 3-Pin TO-220, Pb-Free, Tube", Manufacturer="On Semiconductor", Supplier Part Number 1=BTA08-600BW3G-ND, ComponentLink1Description="Manufacturer URL", ComponentLink1URL=http://www.onsemi.com/, ComponentLink2Description=Datasheet, ComponentLink2URL=http://www.onsemi.com/pub_link/Collateral/BTA08-600BW3-D.PDF, ComponentLink3Description="Package Specification", ComponentLink3URL=http://www.onsemi.com/pub_link/Collateral/221A-07.PDF, DatasheetVersion="Rev. 1", IGT Max (mA)=50, IT(RMS) Max (A)=8, ITSM Max (A)=90, Mounting Technology="Through Hole", PackageDescription="3-Pin Flange Mount, Vertical Straight Lead, Body 9.97 x 4.445 mm, Pitch 2.54 mm", PackageReference=TO-220-3-221A-07, PackageVersion="Rev. O, 07/2008", Packing=Tube, PartNumber=BTA08-600BW3G, RoHS=Pb-Free, Supplier 1=Digi-Key, Supplier 2=Newark, Supplier 3=Mouser, Supplier Part Number 2=13P2072, Supplier Part Number 3=863-BTA08-600BW3G
L1 L2 L3: library part "Chip inductor", "SMD chip inductor", Code_IEC=1005, Code_JEITA=0402, LatestRevisionDate=29-May-2009, LatestRevisionNote="IPC-7351 Footprint Added.", PackageDescription="Chip Inductor", PackageReference=0402-A, Published=8-Jun-2000, Publisher="Altium Limited"
P1 P14: library part "TERMINAL BLOK 2", "Terminal blok konektor 3,5 mm"
P2 P3 P15 P16: "Header, 9-Pin", LatestRevisionDate=17-Jul-2002, LatestRevisionNote="Re-released for DXP Platform.", Publisher="Altium Limited"
P4 P5 P6 P7 P8 P9: library part "TERMINAL BLOK 3", "3 pinski terminal blok konektor"
P10: library part "Header 3", "Header, 3-Pin", LatestRevisionDate=17-Jul-2002, LatestRevisionNote="Re-released for DXP Platform.", Publisher="Altium Limited"
P11 P12 P17 P18: "Header, 12-Pin", LatestRevisionDate=17-Jul-2002, LatestRevisionNote="Re-released for DXP Platform.", Publisher="Altium Limited"
P13: "Header, 8-Pin, Dual row", LatestRevisionDate=17-Jul-2002, LatestRevisionNote="Re-released for DXP Platform.", Publisher="Altium Limited"
R1 R2 R3 R4 R5 R9 R12: library part ERAV, "Metal Film Thermosensitive Chip Resistor, 0.56 Ohm to 10k Ohm Range, 5% Tolerance, 0603 Size, 0.063 W", PackageDocument=Mar-2003, Code_IPC="1608 [0603]", ComponentLink1Description="Manufacturer Link", ComponentLink1URL=http://www.panasonic.com/industrial/components/resistive_products.htm, ComponentLink2Description=Datasheet, ComponentLink2URL=http://www.panasonic.com/industrial/components/pdf/AOF0000CE1.pdf, LatestRevisionDate=19-Mar-2004, LatestRevisionNote="Silkscreen size reduced.", Note="If flow soldering, adjust pad width of PCB Footprint to 0.7 - 0.8 times the width of the resistor.", PackageReference=ERA-0603, Published=17-Dec-2003, Publisher="Altium Limited"
R6 R7 R8 R10 R11 R13 R17 R23 R27 R33 R37 R43 R47 R53 R57 R63 R67 R73 R77 R83 R87: library part ERA3Y, "Rectangular Thick Film Chip Resistor, 10 Ohm to 330k Ohm Range, 0.1% and 0.5% Tolerance, 0603 Size, 0.063 W", PackageDocument=Mar-2003, Code_IPC="1608 [0603]", ComponentLink1Description="Manufacturer Link", ComponentLink1URL=http://www.panasonic.com/industrial/components/resistive_products.htm, ComponentLink2Description=Datasheet, ComponentLink2URL=http://www.panasonic.com/industrial/components/pdf/AOA0000CE8.pdf, LatestRevisionDate=19-Mar-2004, LatestRevisionNote="Silkscreen size reduced.", Note="If flow soldering, adjust pad width of PCB Footprint to 0.7 - 0.8 times the width of the resistor.", PackageReference=ERA-0603, Published=17-Dec-2003, Publisher="Altium Limited"
R14 R15 R16 R18 R19 R20 R21 R22 R24 R25 R26 R28 R29 R30 R31 R32 R34 R35 R36 R38 R39 R40 R41 R42 R44 R45 R46 R48 R49 R50 R51 R52 R54 R55 R56 R58 R59 R60 R61 R62 R64 R65 R66 R68 R69 R70 R71 R72 R74 R75 R76 R78 R79 R80 R81 R82 R84 R85 R86 R88 R89 R90 R91 R92: library part ERAS, "Metal Film Thermosensitive Chip Resistor, 0.56 Ohm to 10k Ohm Range, 5% Tolerance, 0805 Size, 0.1 W", PackageDocument=Mar-2003, Code_IPC="2012 [0805]", ComponentLink1Description="Manufacturer Link", ComponentLink1URL=http://www.panasonic.com/industrial/components/resistive_products.htm, ComponentLink2Description=Datasheet, ComponentLink2URL=http://www.panasonic.com/industrial/components/pdf/AOF0000CE1.pdf, LatestRevisionDate=19-Mar-2004, LatestRevisionNote="Silkscreen size reduced.", Note="If flow soldering, adjust pad width of PCB Footprint to 0.7 - 0.8 times the width of the resistor.", PackageReference=ERA-0805, Published=17-Dec-2003, Publisher="Altium Limited"
U1: "ARM Cortex-M0 32-bit MCU, 32 KB Flash, 4 KB Internal RAM, 39 I/Os, 48-pin LQFP, -40 to 85 degC, Tray", I/Os (High Current)=39, Operating Frequency(F) (Processor speed) (MHz)=48, Supplier Part Number 1=497-14042-ND, Supply Voltage(Vcc) min (V)=2.4, ComponentLink1Description="Manufacturer URL", ComponentLink1URL=http://www.st.com/web/en/home.html, ComponentLink2Description=Datasheet, ComponentLink2URL=http://www.st.com/st-web-ui/static/active/en/resource/technical/document/datasheet/DM00088500.pdf, ComponentLink3Description="Package Specification", ComponentLink3URL=http://www.st.com/st-web-ui/static/active/en/resource/technical/document/datasheet/DM00058181.pdf, Core="ARM Cortex-M0", DatasheetVersion="Rev. 1", FLASH Size (Prog) (kB)=32, Internal RAM Size (kB)=4, Mounting Technology="Surface Mount", PackageDescription="48-Pin Low Profile Quad Flat Package, 7 x 7 mm Body, 0.5 mm Pitch", PackageReference=LQFP48, PackageVersion="Rev. 6, 06/2013", Packing=Tray, PartNumber=STM32F030C6T6, Supplier 1=Digi-Key, Supplier 2=Newark, Supplier 3=Mouser, Supplier Part Number 2=06X3646, Supplier Part Number 3=511-STM32F030C6T6
U2: "Differential Bus Transceiver", Code_IPC=SOIC127P600-8, ComponentLink1Description="Manufacturer Link", ComponentLink1URL=http://www.ti.com/, ComponentLink2Description=Datasheet, ComponentLink2URL=http://www-s.ti.com/sc/ds/sn75176b.pdf, DatasheetVersion=Sep-1989, LatestRevisionDate=13-Apr-2006, LatestRevisionNote="IPC-7351 Footprint Added.", Note="Receiver Hysteresis of 50mV Typical", PackageDescription="8-Pin Small Outline Integrated Circuit 1.27 mm Pitch", PackageReference=D008, PackageVersion=Jan-1998, Published=15-May-2002, Publisher="Altium Limited"
U3: "1Kbit, 400kHz, 1.8V, I2C Serial EEPROM, 5-Pin SOT-23, Industrial Temperature, Tape and Reel", Supplier Part Number 1=24AA01T-I/OTTR-ND, Code_IPC=SOT23-5, ComponentLink1Description=Datasheet, ComponentLink1URL=http://ww1.microchip.com/downloads/en/DeviceDoc/21711J.pdf, ComponentLink2Description="Packaging Specification", ComponentLink2URL=http://www.microchip.com/stellent/groups/techpub_sg/documents/packagingspec/en012702.pdf, ComponentLink3Description="Microchip.com Home", ComponentLink3URL=http://www.microchip.com/, DatasheetVersion="revJ, Jan-2009", PackageDescription="5-Lead Plastic Small Outline Transistor (OT) [SOT-23]", PackageReference=SOT-23-OT5, PackageVersion="revBB, Aug-2009", Published=29-Jan-2009, Publisher="Altium Limited", Supplier 1=Digi-Key, Supplier 2=Digi-Key, Supplier 3=Digi-Key, Supplier 4=Farnell, Supplier Part Number 2=24AA01T-I/OTCT-ND, Supplier Part Number 3=24AA01T-I/OTDKR-ND, Supplier Part Number 4=1331269
U4: "Voltage Supervisor with Active-Low, Open Drain Reset, 1 Supply Monitored, -40 to 125 degC, 3-pin SOT-23 (DBZ), Green (RoHS & no Sb/Br)", Manufacturer="Texas Instruments", Rating=Catalog, Supplier Part Number 1=296-29194-2-ND, Threshold Voltage 1 (typ)(Typ)(V)=4.38, # of supplies monitored=1, Code_JEDEC=TO-236-AB, ComponentLink1Description=Datasheet, ComponentLink1URL=http://www.ti.com/general/docs/lit/getliterature.tsp?genericPartNumber=TLV803M&fileType=pdf, DatasheetVersion=SBVS157B, Iq(Typ)(uA)=9, Mounting Technology="Surface Mount", Output Driver Type / Reset Output="Active-low, Open-drain", PackageDescription="3-Pin Plastic Small-Outline Package, 0.95 mm Pitch, 2.4 mm Lead Span", PackageReference=DBZ3, PackageVersion="revB, Apr-2005", PartNumber=TLV803MDBZR, Reset Threshold Accuracy(%)=2, SubFamily="Supervisor and Reset IC", Supplier 1=Digi-Key, Supplier 2=Digi-Key, Supplier 3=Digi-Key, Supplier 4=Newark, Supplier 5=Mouser, Supplier Part Number 2=296-29194-1-ND, Supplier Part Number 3=296-29194-6-ND, Supplier Part Number 4=58T0286, Supplier Part Number 5=595-TLV803MDBZR, Time Delay(ms)=200, VCC(Max)(V)=6, VCC(Min)(V)=1.1
U5 U7: library part ACS71240
U6: "Positive Voltage Regulator, 5V, 3-Pin TO-220", ComponentLink1Description="Manufacturer URL", ComponentLink1URL=http://www.st.com, ComponentLink2Description=Datasheet, ComponentLink2URL=http://www.st.com/internet/com/TECHNICAL_RESOURCES/TECHNICAL_LITERATURE/DATASHEET/CD00000444.pdf, ComponentLink3Description="Package Specification", ComponentLink3URL=http://www.st.com/internet/com/TECHNICAL_RESOURCES/TECHNICAL_LITERATURE/PACKAGE_INFORMATION/CD00004649.pdf, DatasheetVersion=Nov-2011, PackageDescription="TO, Thru-Hole, Vertical, Heatsink Mounted; 3 In-Line Leads; Pitch 2.54 mm", PackageReference=TO220, PackageVersion=ver3.0, PartNumber=L7805CV
U8: "800mA and 1A Low Dropout Positive Regulator 2.85V, 3.3V, 5V, and Adjustable", ComponentLink1Description="Manufacturer Link", ComponentLink1URL=http://www.ti.com/, ComponentLink2Description=Datasheet, ComponentLink2URL=http://www-s.ti.com/sc/ds/REG1117.pdf, DatasheetVersion=Sep-1997, LatestRevisionDate=17-Jul-2002, LatestRevisionNote="Re-released for DXP Platform.", PackageDescription="SOT-223/SC-73; 4 Leads; Body 6.7 x 7.3 mm, inc. leads (LxW max)", PackageReference=ZZ311, PackageVersion=revC, Published=8-Jun-2000, Publisher="Altium Limited"
U9 U10 U11 U12 U13 U14 U15 U16 U17 U18 U19 U20 U21 U22 U23 U24: "Zero-Cross Optoisolator Triac Driver"

## Via types
v1: diameter 30, hole 10, Top Layer to Bottom Layer, 24 vias
v2: diameter 50, hole 28, Top Layer to Bottom Layer, 13 vias

## Nets (pads, with @x,y where several pads share a name; then routed paths per layer and width w, separated by ;. In a path a pad name is that pad's centre, name@x,y a point inside that pad or via, vN(x,y) a via of type N, cw(c..) or ccw(c..) an arc to the next point about the centre after c; other vN are vias at no path point)
3V3: C1.2 C2.2 C3.2 C7.2 C10.2 C15.2 C18.1 C21.2 L1.1 L2.2 L3.2 R6.2 R7.2 R8.2 U1.1 U1.24 U1.48 U3.4 U4.3 U8.2 U8.4 | length 5431.6
  Top Layer w10: U3.4@868.66,1713.46 U3.4 ; 1212.6,1872.4 1270.55,1814.45 U1.24 ; U1.48 1564.45,1495.55 ; U1.1 1564.45,1495.55 ; C2.2 1598.46,1461.54 1564.45,1495.55 ; R8.2 1937.4,1613.94 U4.3
  Top Layer w20: v1(245,1425) 243.46,1423.46 C10.2 299.68,1370 L2.2 ; L3.2 639.64,2095 666.17,2068.46 663.09,2065.38 663.09,2061.55 631.65,2030.12 629.69,2030.12 620,2020.43 C15.2 ; v1(740,1715) 741.54,1713.46 C7.2 U3.4@868.66,1713.46 ; U3.4 870,1753.46 R7.2 R6.2 ; 1212.6,1872.4 C1.2 v1@1212.6,2042.6 ; C2.2 v1(1650,1405) ; L1.1 v1(1815,1860) 1880,1860 1937.4,1802.6 U4.3
  PWR w70: v1(245,1425) 535,1715 v1(740,1715) 740,1860 ; v1(665,2070) 718.47,2070 740,2048.47 740,1860 ; v1(1212.6,2045) 1215,2042.6 1215,1890 ; v1(1815,1860) 1650,1860 ; C18.1 2119.37,1155.63 2080,1195 1860,1195 v1(1650,1405) 1650,1860 ; 740,1860 1215,1860 1650,1860
  Bottom Layer w30: 2340,750 U8.2 2516.93,750 C21.2
  Bottom Layer w50: v2@2080.63,844.37 v2(2090,835) ; C18.1 2162.5,1036.87 2162.5,835 U8.4@2162.5,750
  other v2: 2090,665 2235,665 2090,750 2235,750 2235,835
5V: C6.1 C17.1 C20.2 U2.8 U6.3 U8.3 | length 3434.5
  Top Layer w20: v1(2223.46,2848.46) C6.1 2228.98,2794.49 U2.8
  PWR w50: U6.3 1910,1445 2085,1620 C17.1 ; v1(2223.46,2848.46) 2223.46,2541.54 2590,2175 2590,1865 2355,1630 C17.1 ; v2(2535,660) 2450,745 2450,1525 C17.1
  Bottom Layer w30: C17.1 C20.2@2406.54,1620 ; U8.3 2437.32,655 2442.32,660 v2(2535,660)
12V: C16.1 C19.2 P14.2 U6.1 | length 1465.4
  PWR w50: U6.1 2321.57,1320 2341.57,1300 C16.1@2341.57,1190
  PWR w80: P14.2 2250,348.66 2341.57,440.24 C16.1@2341.57,1190
  Bottom Layer w30: P14.2 2250,273.46 C19.2
ADDR0: 
ADDR1: 
ADDR2: 
ADDR3: 
ADDR4: 
ADDR_0: P13.16 U1.19 | length 1574.9
  Top Layer w10: U1.19 1395.16,2039.7 1710.46,2355 2340,2355 2495,2200 P13.16
ADDR_1: P13.14 U1.18 | length 1434
  Top Layer w10: U1.18 1414.84,2033.93 1717.91,2337 2253,2337 2395,2195 P13.14
ADDR_2: P13.12 U1.17 | length 1298.9
  Top Layer w10: U1.17 1434.53,2028.16 1725.37,2319 2176,2319 2295,2200 P13.12
ADDR_3: P13.10 U1.16 | length 1161
  Top Layer w10: U1.16 1454.21,2022.39 1732.82,2301 2094,2301 2195,2200 P13.10
ADDR_4: P13.8 U1.15 | length 1025.9
  Top Layer w10: U1.15 1473.9,2016.62 1740.28,2283 2017,2283 2095,2205 P13.8
BTN_FN: P13.4 R11.2 | length 1476.9
  Bottom Layer w10: R11.2 1620,1240 1945,1565 1945,2095 P13.4
BTN_MV: P13.2 R10.2 | length 1686.7
  Bottom Layer w10: R10.2 1145,1430 1317,1258 1608,1258 1845,1495 1845,2095 P13.2
BTNFN: 
BTNMV: 
CURRENT1: C12.2 R9.1 U1.10 | length 1580.3
  Top Layer w10: v1(1485,1705) 1503.9,1723.9 U1.10
  Top Layer w20: v1(370,1430) R9.1 380,1370 C12.2
  Bottom Layer w10: v1(370,1430) 370,1590 545,1765 1040,1765 1100,1705 v1(1485,1705)
CURRENT2: C23.2 R12.1 U1.14 | length 1335
  Top Layer w10: R12.1@408.07,1960 R12.1 ; v1(1445,1735) 1470,1735 1493.58,1758.58 U1.14
  Top Layer w20: C23.2 R12.1@408.07,1960 ; v1(410,1905) R12.1
  Bottom Layer w10: v1(410,1905) 935,1905 1105,1735 v1(1445,1735)
F1: D1.2 D3.2 D5.2 D7.2 D9.2 D11.2 D13.2 D15.2 P17.1 P17.2 P17.11 P17.12 R16.2 R26.2 R36.2 R46.2 R56.2 R66.2 R76.2 R86.2 | length 6302.2
  Top Layer w20: R16.2 535,5265 660,5390 P17.1 ; R36.2 v2(1240,5265) ; R56.2 1755,5265 1790,5300 P17.11 ; D15.2 2347.4,5355.67 R76.2
  PWR w60: D1.2 D3.2 220,5720 645,5720 ; D7.2 1058.16,5716.84 1055,5720 ; v2(1240,5265) 935,5265 890,5310 P17.2 P17.1 660,5390 639.08,5410.92 D5.2 639.08,5714.08 645,5720 ; D9.2 1501.84,5718.16 1500,5720 ; P17.11 P17.12 1920.92,5420.92 D11.2 1920.92,5715.92 1925,5720 ; D15.2 D13.2 2340,5715 2335,5720 1925,5720 ; 645,5720 1055,5720 ; 1055,5720 1500,5720 ; 1500,5720 1925,5720
  Bottom Layer w20: R26.2 72.6,5292.4 40,5325 40,5515 75,5550 205,5550 220,5565 D3.2 ; R46.2 707.6,5337.6 760,5390 P17.1 ; v2(1240,5265) R66.2 ; P17.12 1890,5310 1935,5265 R86.2
F2: D2.2 D4.2 D6.2 D8.2 D10.2 D12.2 D14.2 D16.2 P18.1 P18.2 P18.11 P18.12 R20.2 R30.2 R40.2 R50.2 R60.2 R70.2 R80.2 R90.2 | length 6437
  Top Layer w20: R20.2 535,4035 670,4170 P18.1 ; R40.2 v2(1240,4035) ; R60.2 1745,4035 1790,4080 P18.11 ; D16.2 2342.4,4152.6 R80.2
  PWR w50: D2.2 D4.2 220,4490 235,4505 640,4505 ; P18.2 P18.1 ; D8.2 1058.16,4501.84 1055,4505 ; v2(1240,4035) 860,4035 790,4105 P18.1 ; D10.2 1505,4386.23 1505,4505 ; P18.11 P18.12 1920.92,4200.92 D12.2 1920.92,4504.08 1920,4505 ; D16.2 2340,4495 2330,4505 1920,4505 ; 640,4505 1055,4505 ; 640,4505 639.08,4504.08 D6.2 639.08,4220.92 690,4170 P18.1 ; 1055,4505 1505,4505 ; 1505,4505 1920,4505
  Bottom Layer w20: R30.2 45,4057.6 45,4265 105,4325 210,4325 220,4335 D4.2 ; R50.2 697.6,4112.6 755,4170 P18.1 ; v2(1240,4035) R70.2 ; P18.12 1890,4090 1945,4035 R90.2
GND: C1.1 C2.1 C3.1 C4.1 C5.1 C6.2 C7.1 C8.1 C9.1 C10.1 C11.1 C12.1 C13.1 C14.1 C15.1 C16.2 C17.2 C18.2 C19.1 C20.1 C21.1 C22.1 C23.1 P2.9 P3.9 P10.2 P14.1 R1.1 R5.2 U1.8 U1.23 U1.44 U1.47 U2.5 U3.2 U3.5 U4.1 U5.5 U6.2 U7.5 U8.1 | length 4186.4
  Top Layer w10: U7.5@316.93,2101.93 U7.5 ; U3.5 870,1645 902.4,1677.4 U3.2 ; C3.1@1287.4,1892.6 1316.42,1863.58 U1.23 1316.42,1658.58 1320,1655 ; U1.44 1434.53,1569.53 ; C2.1 1515,1405 1493.58,1426.42 U1.47 1493.58,1658.58 1519.53,1684.53 U1.8 1754.53,1684.53 1775,1705 1775,1737.4 C4.1 ; C5.1 C5.1@1772.4,1806.06
  Top Layer w20: C8.1 176.54,1241.34 C9.1 C10.1 176.54,1423.46 v1(175,1425) 175,1460 185,1470 465,1470 503.46,1431.54 C12.1 503.46,1283.46 475,1255 U5.5 ; U7.5@316.93,2101.93 281.54,2066.54 C22.1 C23.1 281.54,1908.46 325,1865 530,1865 545,1880 C13.1 ; C14.1 v1(668.46,1956.54) ; v1(740,1640) U3.5 ; C3.1@1287.4,1892.6 C1.1 v1(1287.4,2045) ; C4.1 C5.1@1772.4,1806.06 ; C4.1@1775,1737.4 U4.1
  Top Layer w30: v1(2156.54,2848.46) C6.2 2156.54,2735.43 R5.2 2256.54,2733.46 2270,2720 2430,2720 2445,2735 U2.5
  Bottom Layer w30: C19.1 2446.85,276.61 P14.1 ; U8.1 C21.1@2510.55,840.55 ; C20.1@2473.46,1620 C17.2
  Bottom Layer w50: C21.1@2510.55,840.55 2553.43,883.43 C16.2
  other v2: 1335,1580 1400,1580
GND1: 
I2C1_SCL: R6.1 U1.30 U3.1 | length 522.8
  Top Layer w10: R6.1 995,1840 1010,1825 1010,1780 1055,1735 1055,1665 1020,1665 995,1640 U3.1 ; 1055,1664.84 U1.30
I2C1_SDA: R7.1 U1.31 U3.3 | length 466.3
  Top Layer w10: R7.1 963.46,1715.83 U3.3 964.69,1715 v1(1020,1715) ; v1(1020,1610) 1055.16,1645.16 U1.31
  Bottom Layer w10: v1(1020,1610) v1(1020,1715)
L1: P4.3 U5.1 U5.2 | length 2913.9
  Top Layer w20: U5.1@324.31,999.31 324.31,1034.82 U5.1 U5.2 375,1011.2 U5.2@373.33,1009.53
  Top Layer w50: v2(245,935) 300,935
  PWR w80: v2(245,935) 190,935 95,840 95,150 150,95 1775,95 1820,140 P4.3
  other v2: 350,935
L2: P5.3 U7.3 U7.4 | length 768.5
  Top Layer w50: P5.3 240,2540 345,2435 345,2385
L_1: P11.1 P11.2 P11.11 P11.12 U5.3 U5.4 | length 2112.3
  Top Layer w50: 450,940 450,835 575,710 P11.12 P11.11
  PWR w50: P11.11 P11.12 790,625 845,570 1835,570 1890,625 P11.1 P11.2
L_2: P12.1 P12.2 P12.11 P12.12 U7.1 U7.2 | length 2057.2
  Top Layer w50: 445,2380 445,2435 645,2635 P12.1 P12.2
  PWR w50: P12.2 P12.1 790,2700 840,2750 1845,2750 1890,2705 P12.12 P12.11
LED_C0: P13.9 U1.46 | length 1394.3
  Top Layer w10: U1.46 1473.9,1371.1 1522,1323 1682.54,1323 1811.54,1452 1994.28,1452 2081,1538.72 2081,1925.54 2195,2039.54 P13.9
LED_C1: P13.11 U1.45 | length 1488.6
  Top Layer w10: U1.45 1454.21,1365.33 1514.54,1305 1690,1305 1819,1434 2001.73,1434 2099,1531.27 2099,1849 P13.11
LED_C2: P13.13 U1.43 | length 1591.1
  Top Layer w10: U1.43 1414.84,1379.25 1507.09,1287 1697.46,1287 1826.46,1416 2009.19,1416 2117,1523.81 2117,1767 P13.13
LED_C3: P13.15 U1.42 | length 1685.4
  Top Layer w10: U1.42 1395.94,1494.77 1395.94,1372.7 1499.63,1269 1704.91,1269 1833.91,1398 2016.65,1398 2135,1516.35 2135,1685 P13.15
LED_R0: P13.1 U1.6 | length 1033.5
  Top Layer w10: U1.6 1729.84,1645.16 1833,1542 1957,1542 1991,1576 1991,1849 P13.1
LED_R1: P13.3 U1.5 | length 1028.7
  Top Layer w10: U1.5 1724.07,1625.47 1825.54,1524 1964.46,1524 2009,1568.54 2009,1921 1895,2035 P13.3
LED_R2: P13.5 U1.4 | length 1023.9
  Top Layer w10: U1.4 1718.3,1605.79 1818.09,1506 1971.91,1506 2027,1561.09 2027,2003 1995,2035 P13.5
LED_R3: P13.7 U1.2 | length 1082.1
  Top Layer w10: U1.2 1706.76,1566.42 1803.18,1470 1986.82,1470 2063,1546.18 2063,2013 P13.7
LEDC0: 
LEDC1: 
LEDC2: 
LEDC3: 
LEDR0: 
LEDR1: 
LEDR2: 
LEDR3: 
NetC4_2: C4.2 C5.2 L1.2 U1.9 | length 275.5
  Top Layer w10: U1.9 1669.21,1704.21 1687.6,1722.6 C4.2@1687.6,1740 ; C4.2 C4.2@1701.54,1743.94
  Top Layer w20: C4.2@1701.54,1743.94 C5.2 1701.54,1846.22 L1.2
NetC8_2: C8.2 C9.2 L2.1 U5.8 | length 224.9
  Top Layer w20: L2.1 253.78,1320.32 C9.2 250,1303.46 C8.2 265.51,1224.49 U5.8
NetC11_2: C11.2 U5.6 | length 88.9
  Top Layer w20: U5.6 425,1275 433.07,1283.07 C11.2
NetC13_2: C13.2 C14.2 L3.1 U7.8 | length 239.5
  Top Layer w10: C14.2@466.93,2026.54 C14.2 ; C13.2@543.94,2023.46 C13.2@545,2024.53
  Top Layer w20: C14.2@466.93,2026.54 U7.8 ; C14.2 C13.2@543.94,2023.46 ; C13.2@545,2024.53 L3.1@545,2095.32
NetC22_2: C22.2 U7.6 | length 98.2
  Top Layer w20: C22.2 348.46,2048.46 366.93,2066.93 U7.6
NetD1_1: D1.1 P17.3 R21.2 | length 857
  Bottom Layer w20: R21.2@260,5480 320,5420 D1.1 475,5380 555,5460 920,5460 P17.3
NetD1_3: D1.3 R21.1 U9.4 | length 429.1
  PWR w20: D1.3 120,5340 270,5190 U9.4
  Bottom Layer w20: D1.3 120,5414.8 R21.1@185.2,5480
NetD2_1: D2.1 P18.3 R22.2 | length 868.4
  Bottom Layer w20: R22.2 320,4182.4 D2.1 325,4140 530,4140 630,4240 920,4240 P18.3
NetD2_3: D2.3 R22.1 U10.4 | length 423.1
  PWR w20: D2.3 120,4100 270,3950 U10.4
  Bottom Layer w20: D2.3 120,4182.4 R22.1
NetD3_1: D3.1 P17.4 R31.2 | length 991.2
  Bottom Layer w20: R31.2 320,5657.4 D3.1 435,5505 975,5505 P17.4
NetD3_3: D3.3 R31.1 U11.4 | length 893.2
  GND w20: D3.3 120,5560 180,5500 340,5500 587.14,5252.86 U11.4
  Bottom Layer w20: D3.3 120,5657.4 R31.1
NetD4_1: D4.1 P18.4 R32.2 | length 981.2
  Bottom Layer w20: R32.2@257.4,4490 320,4427.4 D4.1 435,4285 975,4285 P18.4
NetD4_3: D4.3 R32.1 U12.4 | length 901.9
  GND w20: D4.3 120,4320 180,4260 355,4260 587.14,4027.86 U12.4
  Bottom Layer w20: D4.3 120,4427.4 R32.1@182.6,4490
NetD5_1: D5.1 P17.5 R41.2 | length 671.7
  Bottom Layer w20: R41.2 739.08,5658.32 D5.1 804.08,5555 1025,5555 P17.5
NetD5_3: D5.3 R41.1 U13.4 | length 857.2
  GND w20: D5.3 539.08,5395.92 690,5245 860,5245 904.29,5200.71 U13.4
  Bottom Layer w20: D5.3 539.08,5656.48 R41.1
NetD6_1: D6.1 P18.5 R42.2 | length 704.8
  Bottom Layer w20: R42.2 739.08,4443.32 D6.1 814.08,4325 1095,4325 1190,4230 P18.5
NetD6_3: D6.3 R42.1 U14.4 | length 851.7
  GND w20: D6.3 539.08,4185.92 715,4010 855,4010 904.29,3960.71 U14.4
  Bottom Layer w20: D6.3 539.08,4431.48 R42.1
NetD7_1: D7.1 P17.6 R51.2 | length 409.8
  Bottom Layer w20: R51.2 1158.16,5659.24 D7.1 1290,5488.16 P17.6
NetD7_3: D7.3 R51.1 U15.4 | length 1262.5
  GND w20: D7.3 958.16,5553.16 885,5480 725,5480 680,5435 680,5340 715,5305 1095,5305 1221.43,5178.57 U15.4
  Bottom Layer w20: D7.3 958.16,5655.56 R51.1
NetD8_1: D8.1 P18.6 R52.2 | length 408.8
  Bottom Layer w20: R52.2 1158.16,4441.65 D8.1 1290,4268.16 P18.6
NetD8_3: D8.3 R52.1 U16.4 | length 1245.2
  GND w20: D8.3 958.16,4338.16 875,4255 730,4255 700,4225 700,4115 740,4075 1115,4075 1221.43,3968.57 U16.4
  Bottom Layer w20: D8.3 958.16,4433.16 R52.1
NetD9_1: D9.1 P17.7 R61.2 | length 360.1
  Bottom Layer w20: P17.7 1390,5591.23 D9.1 1401.84,5659.24 R61.2
NetD9_3: D9.3 R61.1 U17.4 | length 1280.6
  GND w20: U17.4 1538.57,5218.57 1605,5285 1910,5285 1970,5345 1970,5450 1915,5505 1635,5505 1601.84,5538.16 D9.3
  Bottom Layer w20: R61.1 1601.84,5655.56 D9.3
NetD10_1: D10.1 P18.7 R62.2 | length 362.1
  Bottom Layer w20: P18.7 1390,4371.23 D10.1 1401.84,4434.24 R62.2
NetD10_3: D10.3 R62.1 U18.4 | length 1299.8
  GND w20: U18.4 1538.57,4028.57 1580,4070 1945,4070 1980,4105 1980,4230 1945,4265 1719.91,4265 D10.3
  Bottom Layer w20: R62.1 1601.84,4440.56 D10.3
NetD11_1: D11.1 P17.8 R71.2 | length 561.7
  Bottom Layer w20: P17.8 1605,5505 1722.85,5505 D11.1 1820.92,5658.32 R71.2
NetD11_3: D11.3 R71.1 U19.4 | length 674.7
  GND w20: U19.4 2020.92,5305.21 D11.3
  Bottom Layer w20: R71.1 2020.92,5656.48 D11.3
NetD12_1: D12.1 P18.8 R72.2 | length 563.7
  Bottom Layer w20: P18.8 1620,4300 1737.85,4300 D12.1 1820.92,4433.32 R72.2
NetD12_3: D12.3 R72.1 U20.4 | length 778.3
  GND w20: U20.4 1855.71,3985.71 1885,4015 2000,4015 2055,4070 2055,4348.99 D12.3
  Bottom Layer w20: R72.1 2020.92,4441.48 D12.3
NetD13_1: D13.1 P17.9 R81.2 | length 885.3
  Bottom Layer w20: P17.9 1660,5460 2096.93,5460 D13.1 2240,5647.4 R81.2
NetD13_3: D13.3 R81.1 U21.4 | length 856.8
  GND w20: U21.4 2172.86,5247.14 2140,5280 2140,5430 2200,5490 2400,5490 2440,5530 D13.3
  Bottom Layer w20: R81.1 2440,5667.4 D13.3
NetD14_1: D14.1 P18.9 R82.2 | length 883.2
  Bottom Layer w20: P18.9 1665,4245 2101.93,4245 D14.1 2240,4432.4 R82.2
NetD14_3: D14.3 R82.1 U22.4 | length 853.2
  GND w20: U22.4 2172.86,4037.14 2125,4085 2125,4220 2165,4260 2316.93,4260 D14.3
  Bottom Layer w20: R82.1 2440,4442.4 D14.3
NetD15_1: D15.1 P17.10 R91.2 | length 815
  PWR w20: P17.10 1690,5325 1740,5275 2075,5275 2163.07,5363.07 D15.1
  Bottom Layer w20: D15.1 2240,5417.4 R91.2
NetD15_3: D15.3 R91.1 U23.4 | length 386.6
  Top Layer w20: D15.3 2490,5313.07 U23.4
  Bottom Layer w20: R91.1 2440,5417.4 D15.3
NetD16_1: D16.1 P18.10 R92.2 | length 813.1
  PWR w20: P18.10 1690,4115 1745,4060 2045,4060 2140,4155 D16.1
  Bottom Layer w20: D16.1 2240,4212.4 R92.2
NetD16_3: D16.3 R92.1 U24.4 | length 411.6
  Top Layer w20: D16.3 2490,4105 U24.4
  Bottom Layer w20: R92.1 2440,4212.4 D16.3
NetD17_1: 
NetD21_1: 
NetD25_1: 
NetD29_1: 
NetP1_1: P1.1 R3.1 | length 210.6
  Top Layer w20: P1.1 2253.07,3108.5 R3.1@2253.07,2900
NetP1_2: P1.2 R2.1 | length 224.5
  Top Layer w20: P1.2 2448.43,3026.57 2483.46,2991.54 R2.1 R2.1@2483.46,2900
NetP15_1: P15.1 R13.1 | length 103.6
  Top Layer w10: R13.1 P15.1@781.73,4666.73
NetP15_2: P15.2 R23.1 | length 95.6
  Bottom Layer w10: R23.1 888.46,4646.54 P15.2
NetP15_3: P15.3 R33.1 | length 97.7
  Top Layer w10: R33.1 990,4733.46 P15.3
NetP15_4: P15.4 R43.1 | length 95.6
  Bottom Layer w10: R43.1 1090,4738.46 P15.4
NetP15_5: P15.5 R53.1 | length 97.7
  Top Layer w10: P15.5 1190,4733.46 R53.1
NetP15_6: P15.6 R63.1 | length 122.6
  Top Layer w10: P15.6 1356.54,4711.54 R63.1
NetP15_7: P15.7 R73.1 | length 95.6
  Bottom Layer w10: P15.7 1390,4738.46 R73.1
NetP15_8: P15.8 R83.1 | length 655.9
  Bottom Layer w10: P15.8 1555,4710 1955,4710 1985,4740 R83.1
NetP15_9: P15.9 U9.2 U11.2 U13.2 U15.2 U17.2 U19.2 U21.2 U23.2 | length 3449.7
  PWR w10: U9.2 170,4910 190,4930 490,4930 ; U11.2 487.14,4927.14 490,4930 ; U13.2 804.29,4929.29 805,4930 ; U15.2 1121.43,4928.57 1120,4930 ; U17.2 1438.57,4928.57 1440,4930 ; P15.9 1755,4645 ; U21.2 2072.86,4647.14 2075,4645 ; U23.2 2390,4715 2320,4645 2075,4645 ; 490,4930 805,4930 ; 805,4930 1120,4930 ; 1120,4930 1440,4930 ; 1440,4930 1735,4930 1755.71,4909.29 U19.2 1755.71,4645.71 1755,4645 ; 1755,4645 2075,4645
NetP16_1: P16.1 R17.1 | length 143.1
  Top Layer w10: R17.1 750,3515 790,3475 P16.1
NetP16_2: P16.2 R27.1 | length 251.9
  Bottom Layer w10: R27.1 865,3515 890,3490 P16.2
NetP16_3: P16.3 R37.1 | length 90.6
  Top Layer w10: R37.1 990,3513.46 P16.3
NetP16_4: P16.4 R47.1 | length 90.6
  Bottom Layer w10: R47.1 1088.46,3426.54 P16.4
NetP16_5: P16.5 R57.1 | length 90.6
  Top Layer w10: P16.5 1190,3513.46 R57.1
NetP16_6: P16.6 R67.1 | length 90.6
  Bottom Layer w10: P16.6 1290,3513.46 R67.1
NetP16_7: P16.7 R77.1 | length 90.6
  Top Layer w10: P16.7 1390,3513.46 R77.1
NetP16_8: P16.8 R87.1 | length 268.8
  Bottom Layer w10: P16.8 1560,3495 1645,3495 1665,3515 R87.1
NetP16_9: P16.9 U10.2 U12.2 U14.2 U16.2 U18.2 U20.2 U22.2 U24.2 | length 3847.2
  PWR w10: U10.2 170,3675 195,3700 485,3700 ; U12.2 487.14,3697.86 485,3700 ; U14.2 804.29,3694.29 810,3700 ; U16.2 1121.43,3698.57 1120,3700 ; U18.2 1438.57,3698.57 1440,3700 ; P16.9 2300,3425 2390,3515 U24.2 2390,3670 2360,3700 2075,3700 ; U20.2 1755.71,3695.71 1760,3700 ; U22.2 2072.86,3697.86 2075,3700 ; 485,3700 810,3700 ; 810,3700 1120,3700 ; 1120,3700 1440,3700 ; 1440,3700 1760,3700 ; 1760,3700 2075,3700
NetR2_2: R2.2 U2.6 | length 114.4
  Top Layer w20: U2.6 2395,2840 2416.54,2861.54 R2.2@2416.54,2900
NetR3_2: R3.2 U2.7 | length 115.9
  Top Layer w20: R3.2@2320,2900 2320,2870 2345,2845 U2.7
NetR4_2: R4.2 U2.1 | length 73.8
  Top Layer w20: R4.2 2228.98,2605.51 U2.1
NetR8_1: R8.1 U1.7 U4.2 | length 362.3
  Top Layer w10: U1.7 1860.35,1664.84 1856.54,1661.02 R8.1
NetR9_2: R9.2 U5.7 | length 90.7
  Top Layer w20: R9.2 375,1308.07 U5.7
NetR12_2: R12.2 U7.7 | length 93.4
  Top Layer w10: R12.2 R12.2@416.93,2031.93
  Top Layer w20: R12.2@416.93,2031.93 U7.7
NetR13_2: R13.2 U9.1 | length 648.1
  Top Layer w10: U9.1 70,4780 110,4740 R13.2
NetR14_1: R14.1 U9.6 | length 126.1
  Top Layer w20: U9.6 70,5262.4 R14.1
NetR14_2: R14.2 R15.1 | length 75.2
  Top Layer w20: R14.2 R15.1
NetR15_2: R15.2 R16.1 | length 75.2
  Top Layer w20: R15.2 R16.1
NetR17_2: R17.2 U10.1 | length 654
  Top Layer w10: U10.1 70,3545 100,3515 R17.2
NetR18_1: R18.1 U10.6 | length 126
  Top Layer w20: R18.1 70,4032.6 U10.6
NetR18_2: R18.2 R19.1 | length 75.2
  Top Layer w20: R18.2 R19.1
NetR19_2: R19.2 R20.1 | length 80.2
  Top Layer w20: R19.2 R20.1
NetR23_2: R23.2 U11.1 | length 518.1
  Bottom Layer w10: U11.1 387.14,4767.86 415,4740 R23.2
NetR24_1: R24.1 U11.6 | length 150
  Bottom Layer w20: U11.6 387.14,5177.14 447.4,5237.4 R24.1
NetR24_2: R24.2 R25.1 | length 75.2
  Bottom Layer w20: R25.1 R24.2
NetR25_2: R25.2 R26.1 | length 75.2
  Bottom Layer w20: R26.1 R25.2
NetR27_2: R27.2 U12.1 | length 338.1
  Bottom Layer w10: U12.1 387.14,3542.86 415,3515 R27.2
NetR28_1: R28.1 U12.6 | length 150
  Bottom Layer w20: U12.6 387.14,3937.14 447.4,3997.4 R28.1
NetR28_2: R28.2 R29.1 | length 80.2
  Bottom Layer w20: R29.1 R28.2
NetR29_2: R29.2 R30.1 | length 75.2
  Bottom Layer w20: R30.1 R29.2
NetR33_2: R33.2 U13.1 | length 253.7
  Top Layer w10: U13.1 804.29,4740 R33.2
NetR34_1: R34.1 U13.6 | length 126.4
  Top Layer w20: U13.6 704.29,5261.69 R34.1
NetR34_2: R34.2 R35.1 | length 70.2
  Top Layer w20: R34.2 R35.1
NetR35_2: R35.2 R36.1 | length 80.2
  Top Layer w20: R35.2 R36.1
NetR37_2: R37.2 U14.1 | length 256.6
  Top Layer w10: U14.1 799.29,3515 R37.2
NetR38_1: R38.1 U14.6 | length 127.8
  Top Layer w20: R38.1 704.29,4028.31 U14.6
NetR38_2: R38.2 R39.1 | length 75.2
  Top Layer w20: R38.2 R39.1
NetR39_2: R39.2 R40.1 | length 80.2
  Top Layer w20: R39.2 R40.1
NetR43_2: R43.2 U15.1 | length 100
  Bottom Layer w10: U15.1 1021.54,4839.89 R43.2
NetR44_1: R44.1 U15.6 | length 150.3
  Bottom Layer w20: U15.6 1021.43,5171.43 1082.4,5232.4 R44.1
NetR44_2: R44.2 R45.1 | length 80.2
  Bottom Layer w10: R45.1 R44.2
NetR45_2: R45.2 R46.1 | length 70.2
  Bottom Layer w20: R46.1 R45.2
NetR47_2: R47.2 U16.1 | length 95
  Bottom Layer w10: U16.1 1021.54,3609.89 R47.2
NetR48_1: R48.1 U16.6 | length 148.2
  Bottom Layer w20: U16.6 1021.43,3941.43 1077.4,3997.4 R48.1
NetR48_2: R48.2 R49.1 | length 80.2
  Bottom Layer w20: R49.1 R48.2
NetR49_2: R49.2 R50.1 | length 75.2
  Bottom Layer w20: R50.1 R49.2
NetR53_2: R53.2 U17.1 | length 131.1
  Top Layer w10: R53.2 1263.46,4764.89 U17.1
NetR54_1: R54.1 U17.6 | length 125.4
  Top Layer w20: R54.1 1338.57,5264.03 U17.6
NetR54_2: R54.2 R55.1 | length 80.2
  Top Layer w20: R54.2 R55.1
NetR55_2: R55.2 R56.1 | length 75.2
  Top Layer w20: R55.2 R56.1
NetR57_2: R57.2 U18.1 | length 161.3
  Top Layer w10: R57.2 1315,3515 1338.57,3538.57 U18.1
NetR58_1: R58.1 U18.6 | length 126.7
  Top Layer w20: U18.6 1338.57,4030.97 R58.1
NetR58_2: R58.2 R59.1 | length 85.2
  Top Layer w20: R58.2 R59.1
NetR59_2: R59.2 R60.1 | length 75.2
  Top Layer w20: R59.2 R60.1